# Altium PCB 水下去机器人控制板2020.PcbDoc
Units mm, origin at the board's own origin, x right, y up, seen from the top; angles counter-clockwise.
Board outline 100 x 96 mm, 4 copper layers (Top Layer, AGND, PWR, Bottom Layer), stack 0.603 mm thick; 156 components, 105 nets, 515 pads, 256 vias.
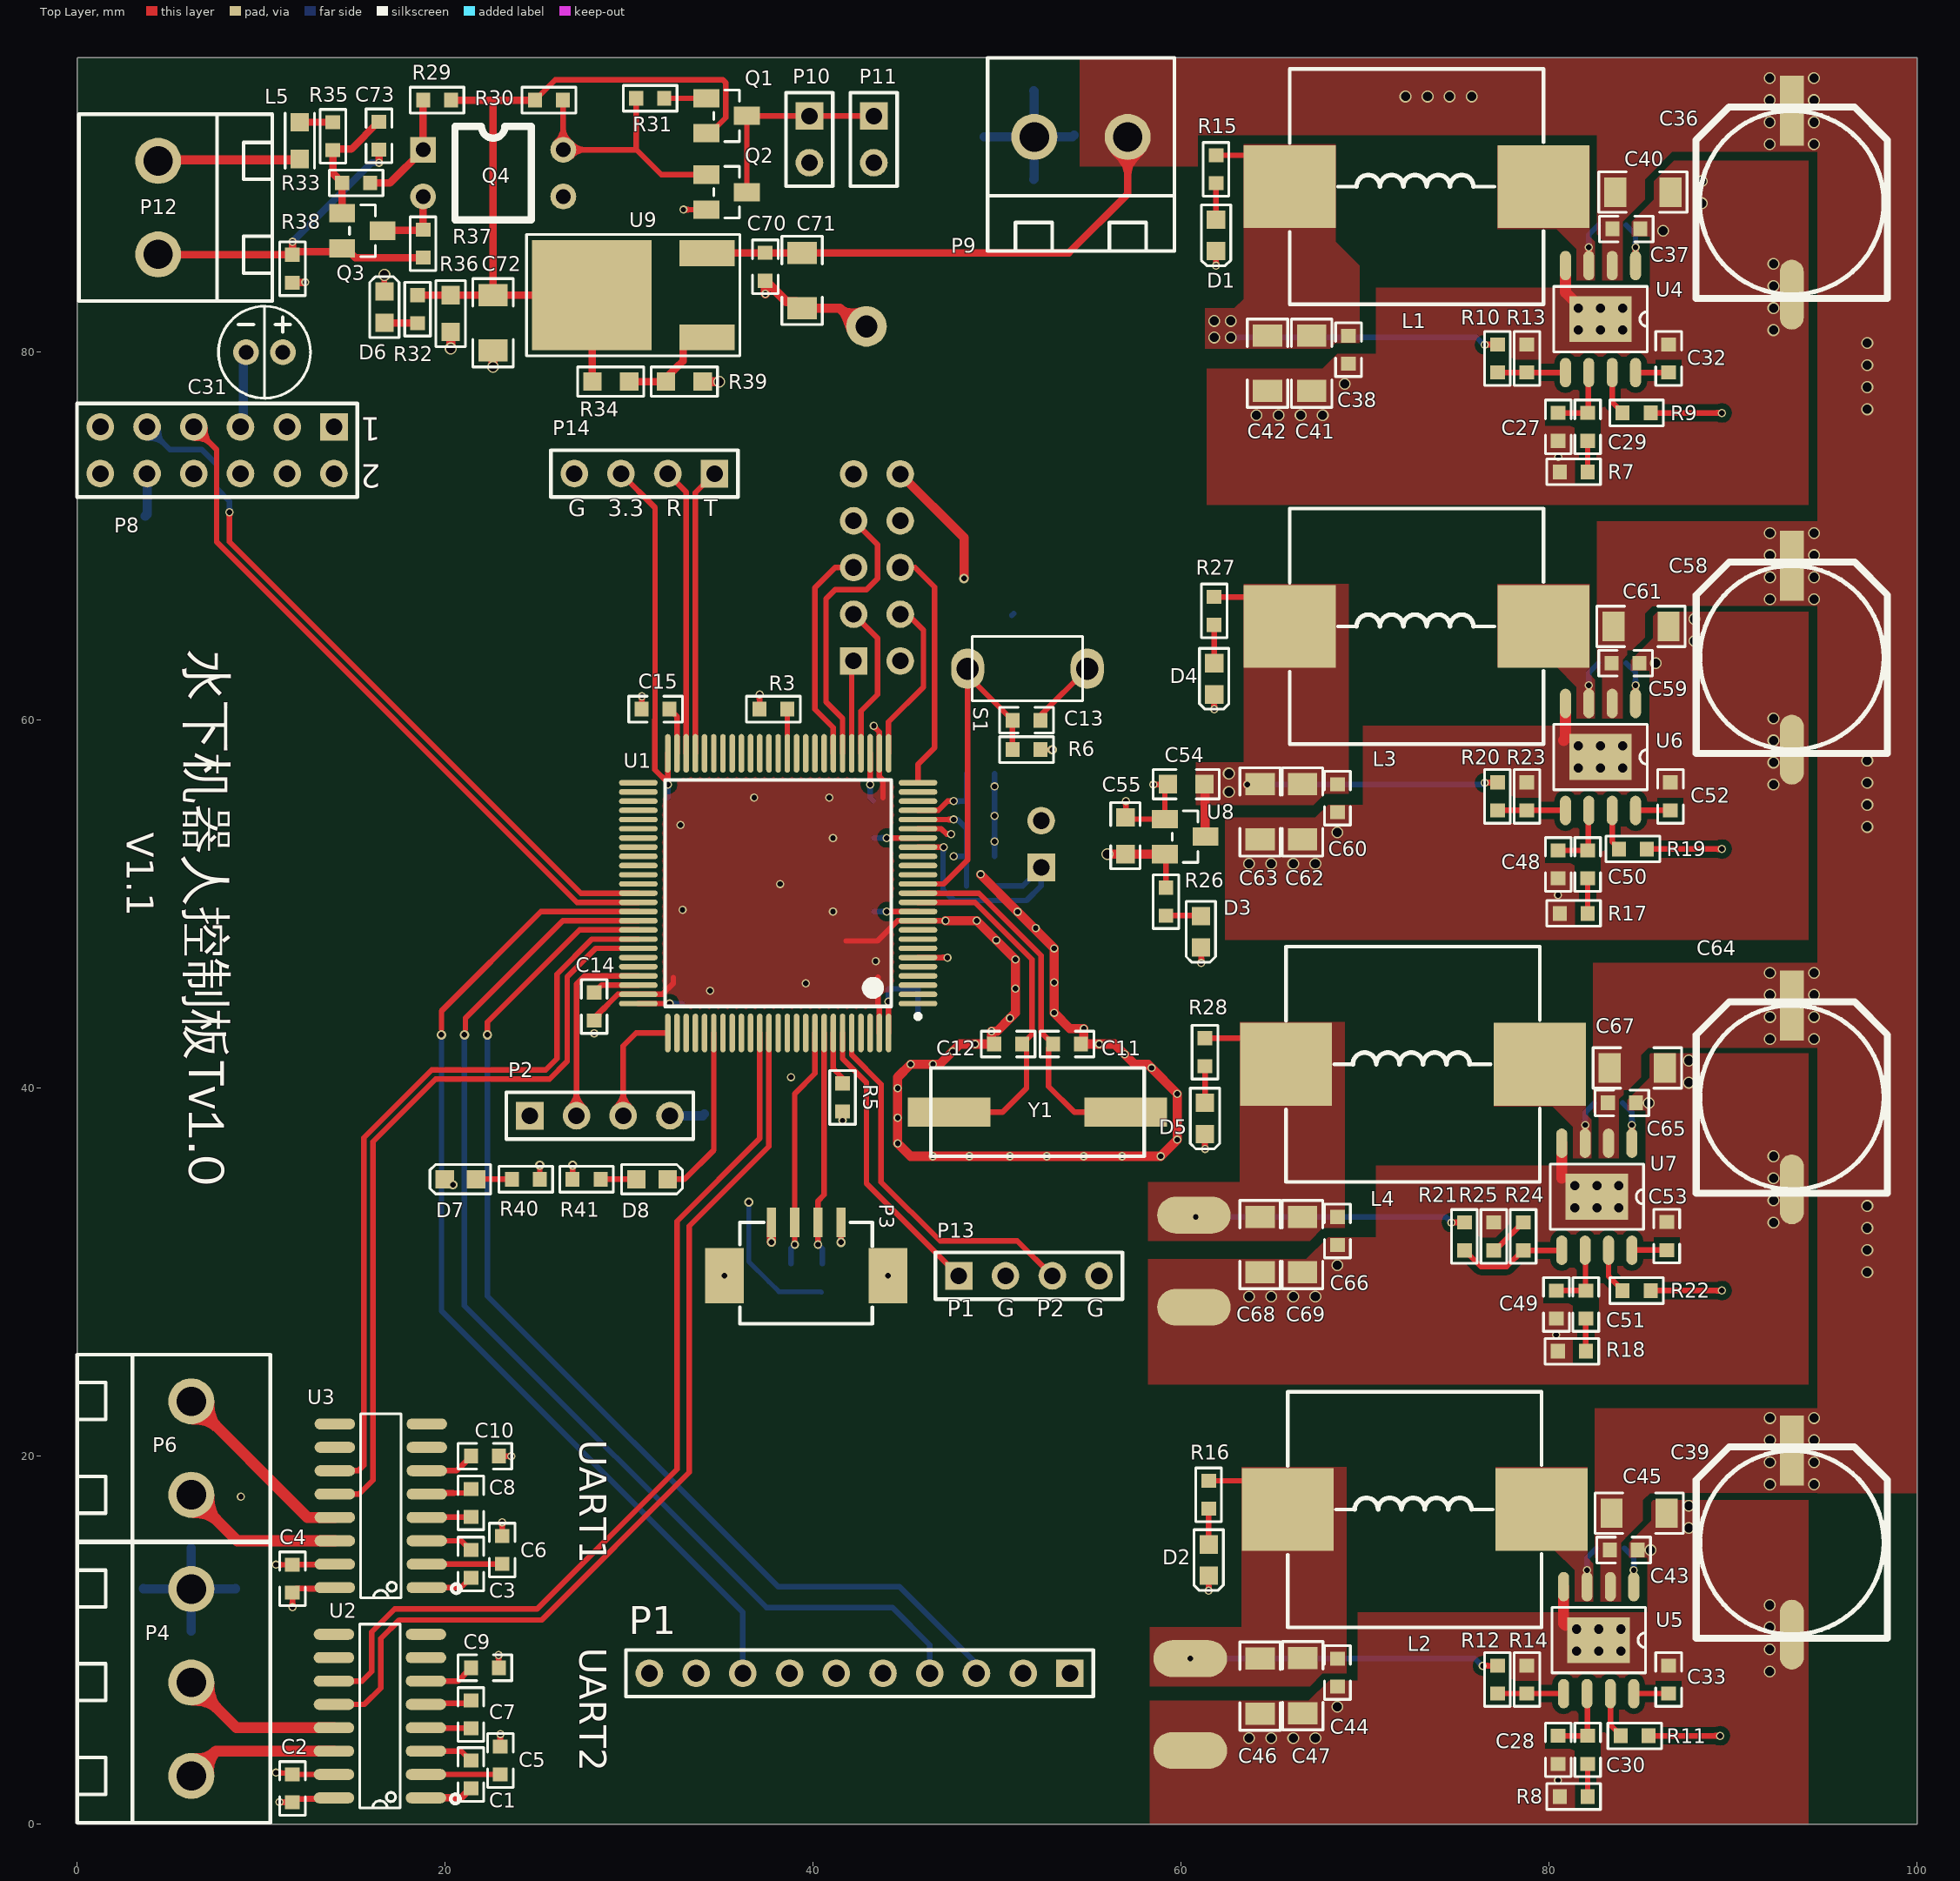
[diagram p0: Top Layer view]
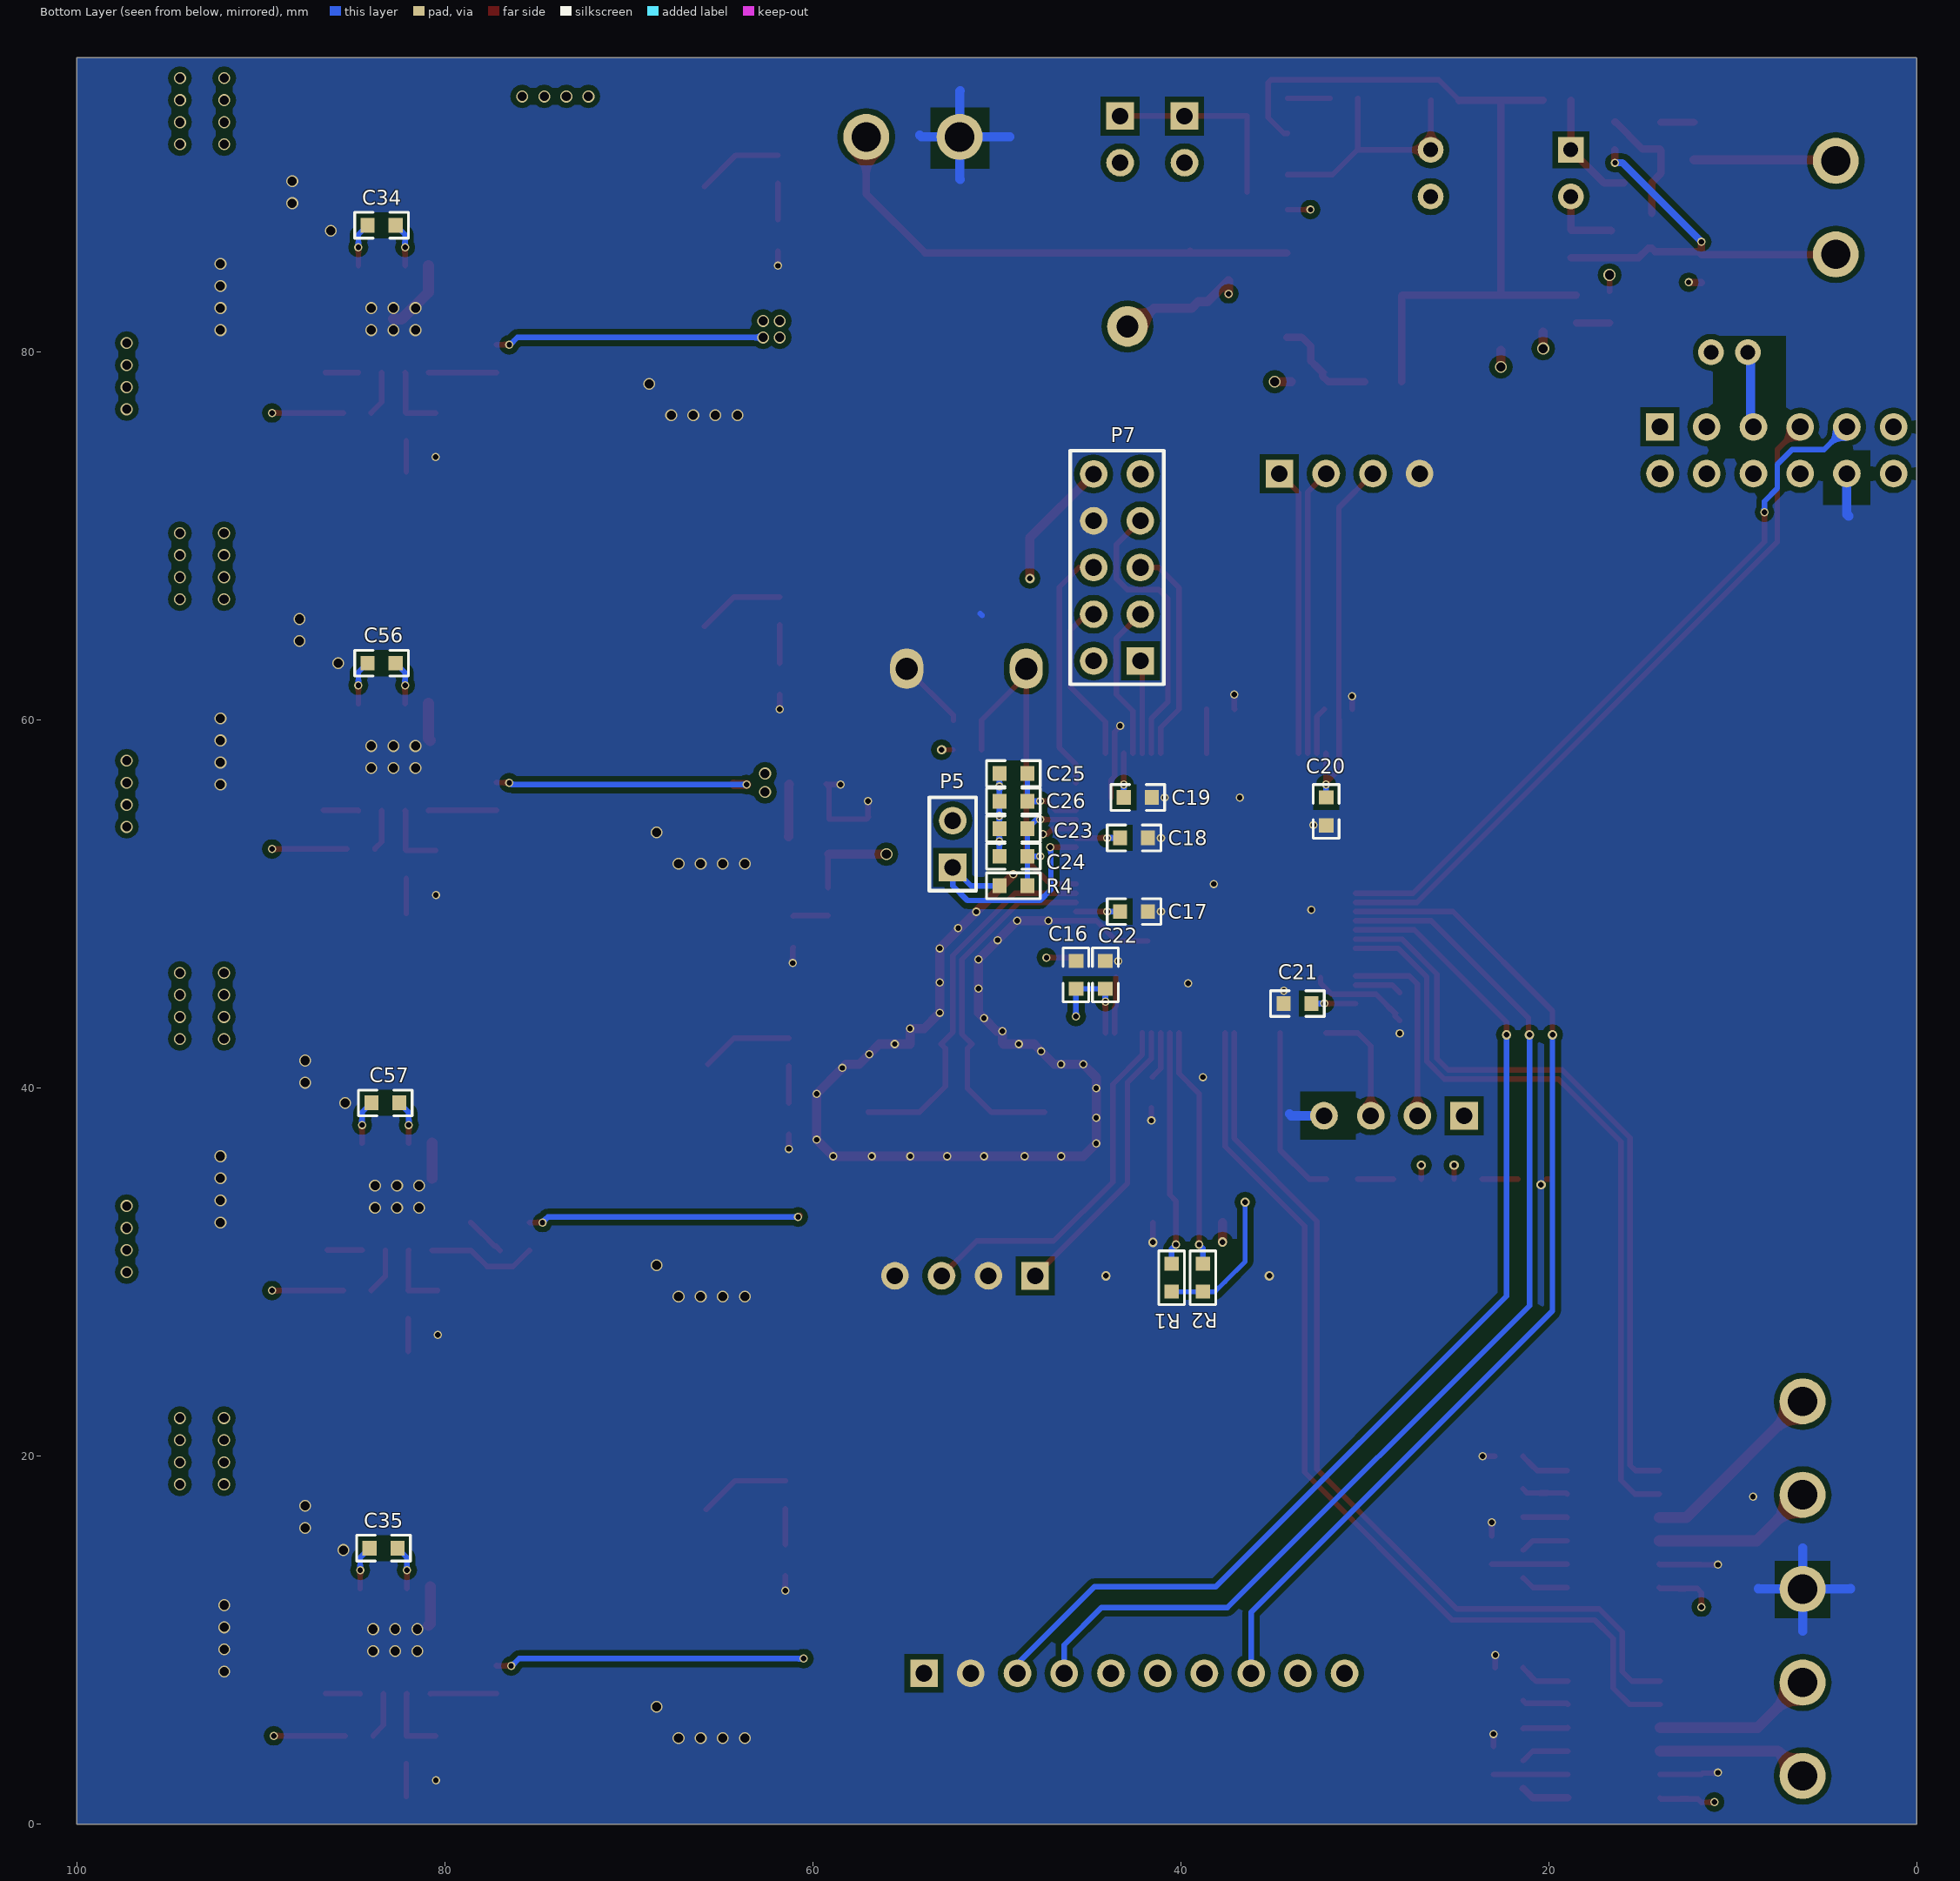
[diagram p1: Bottom Layer view, seen from below]
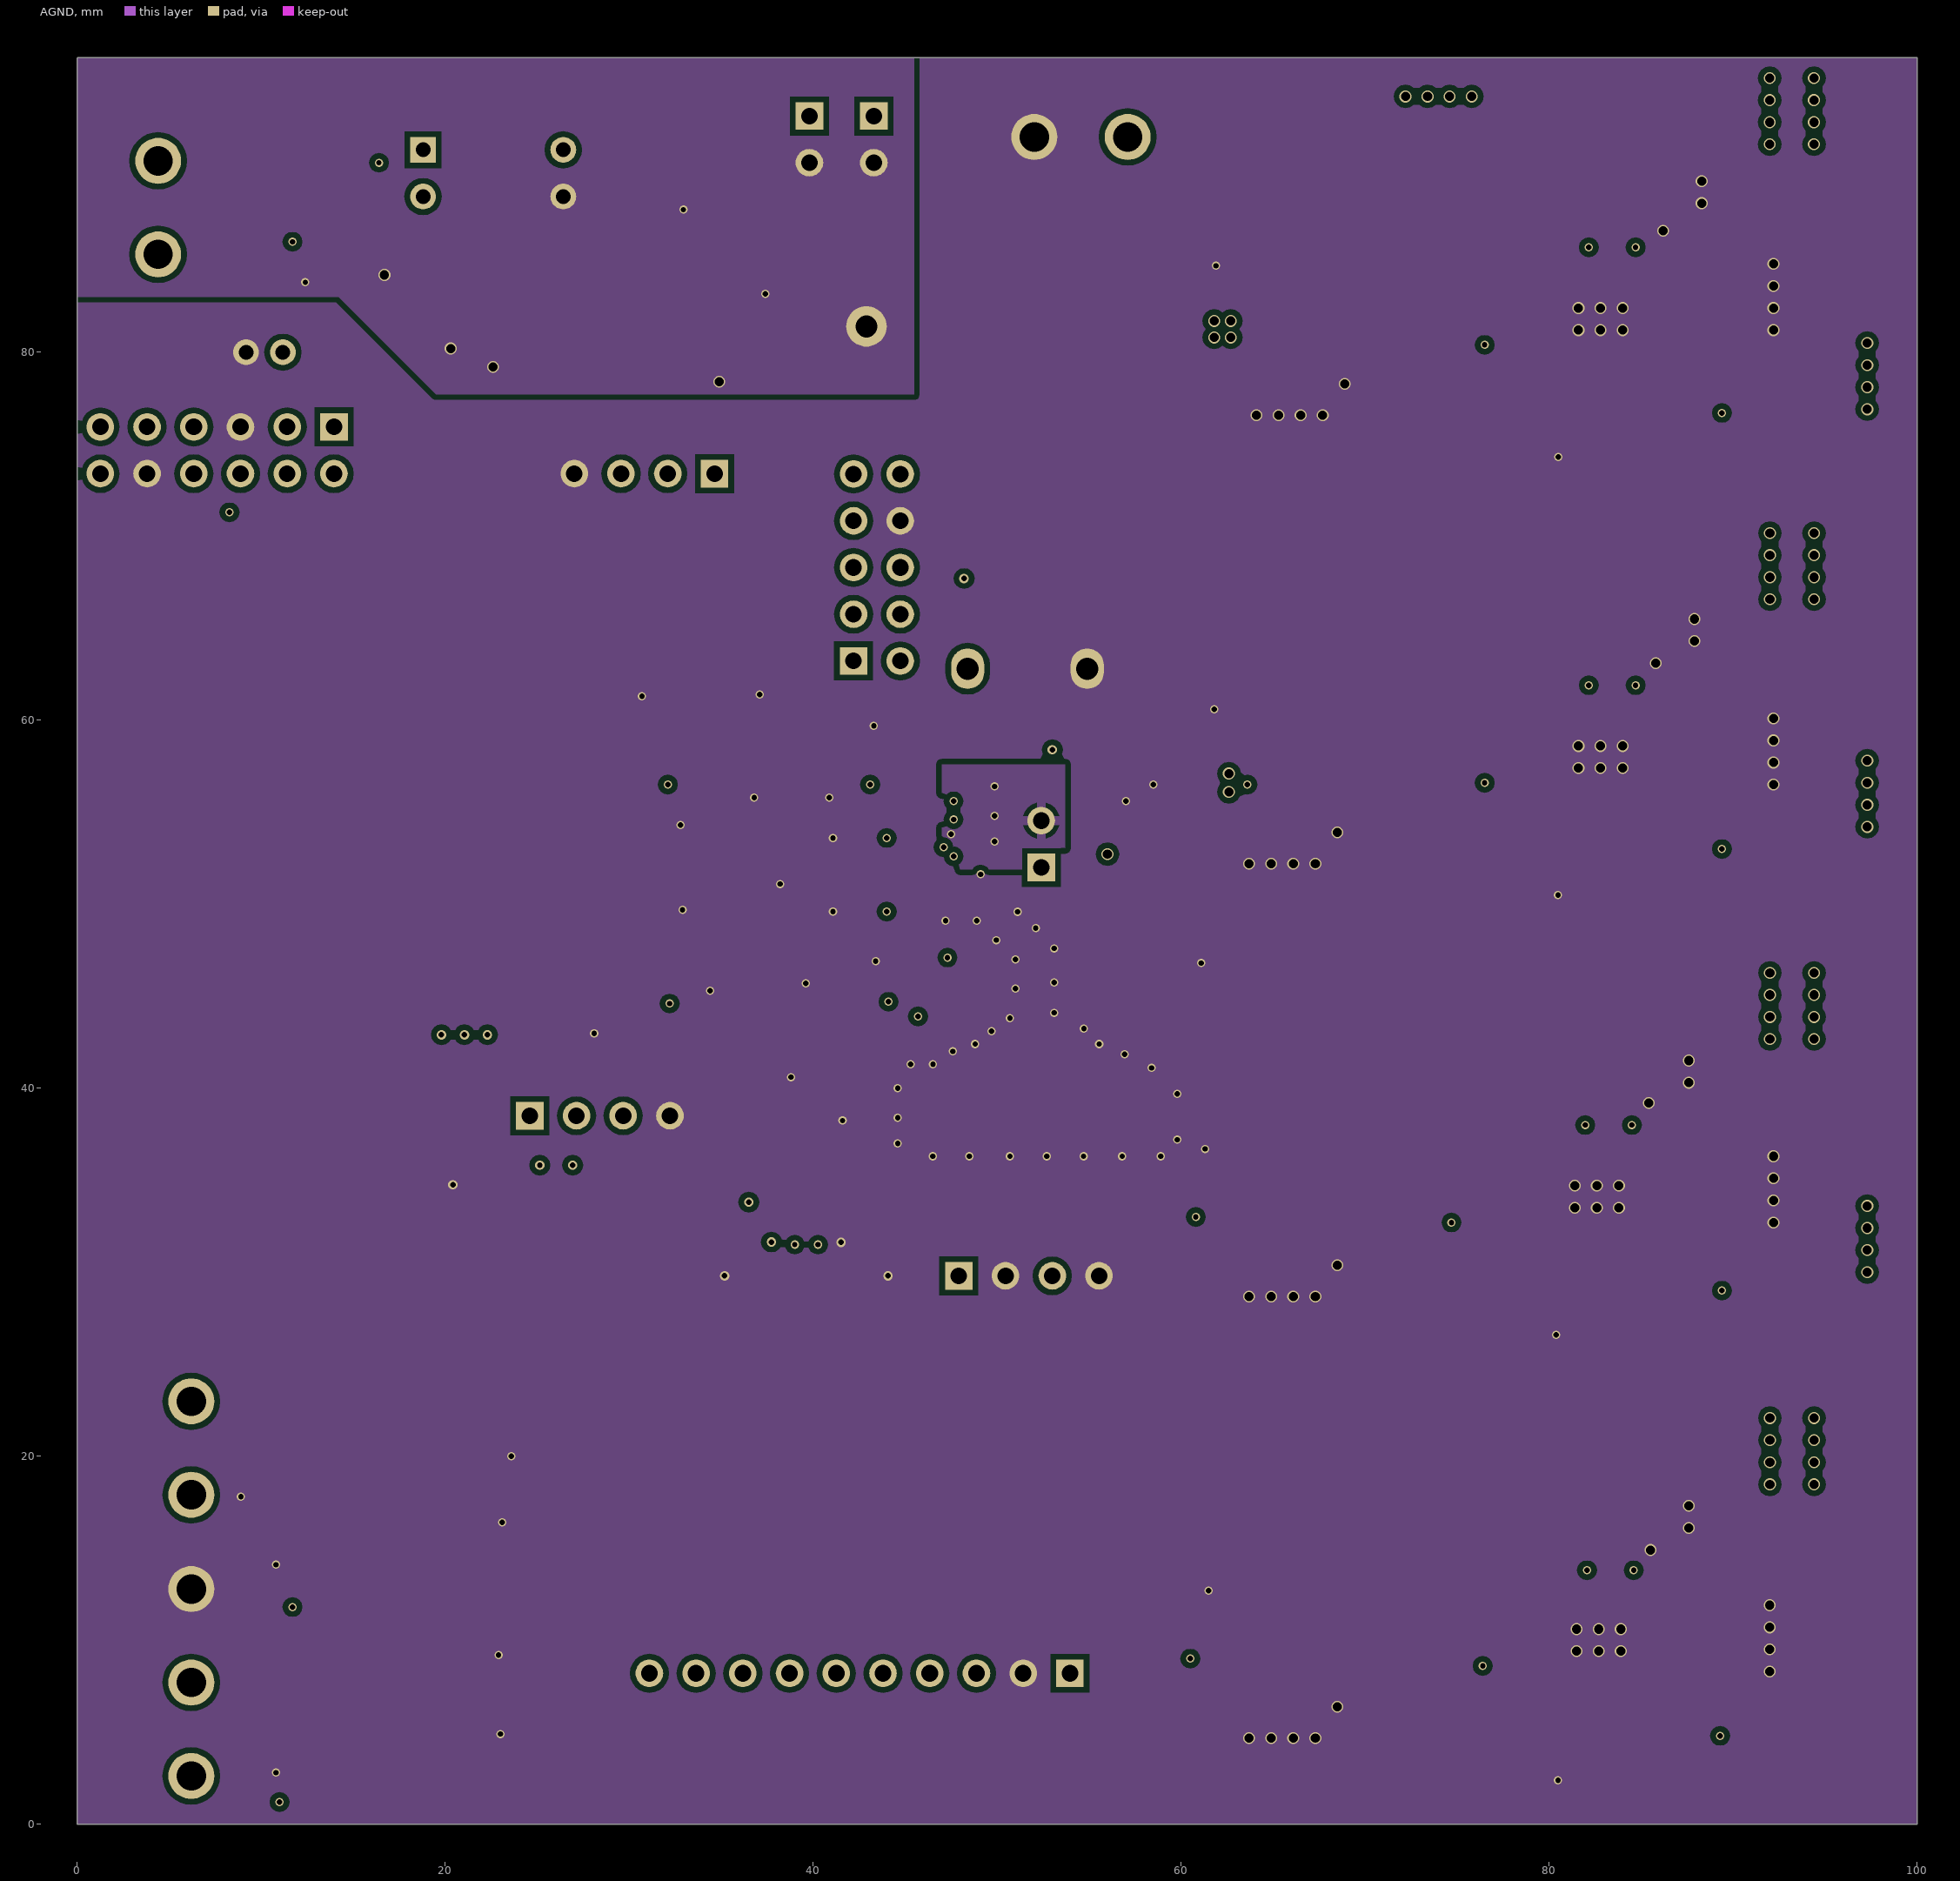
[diagram p2: AGND]
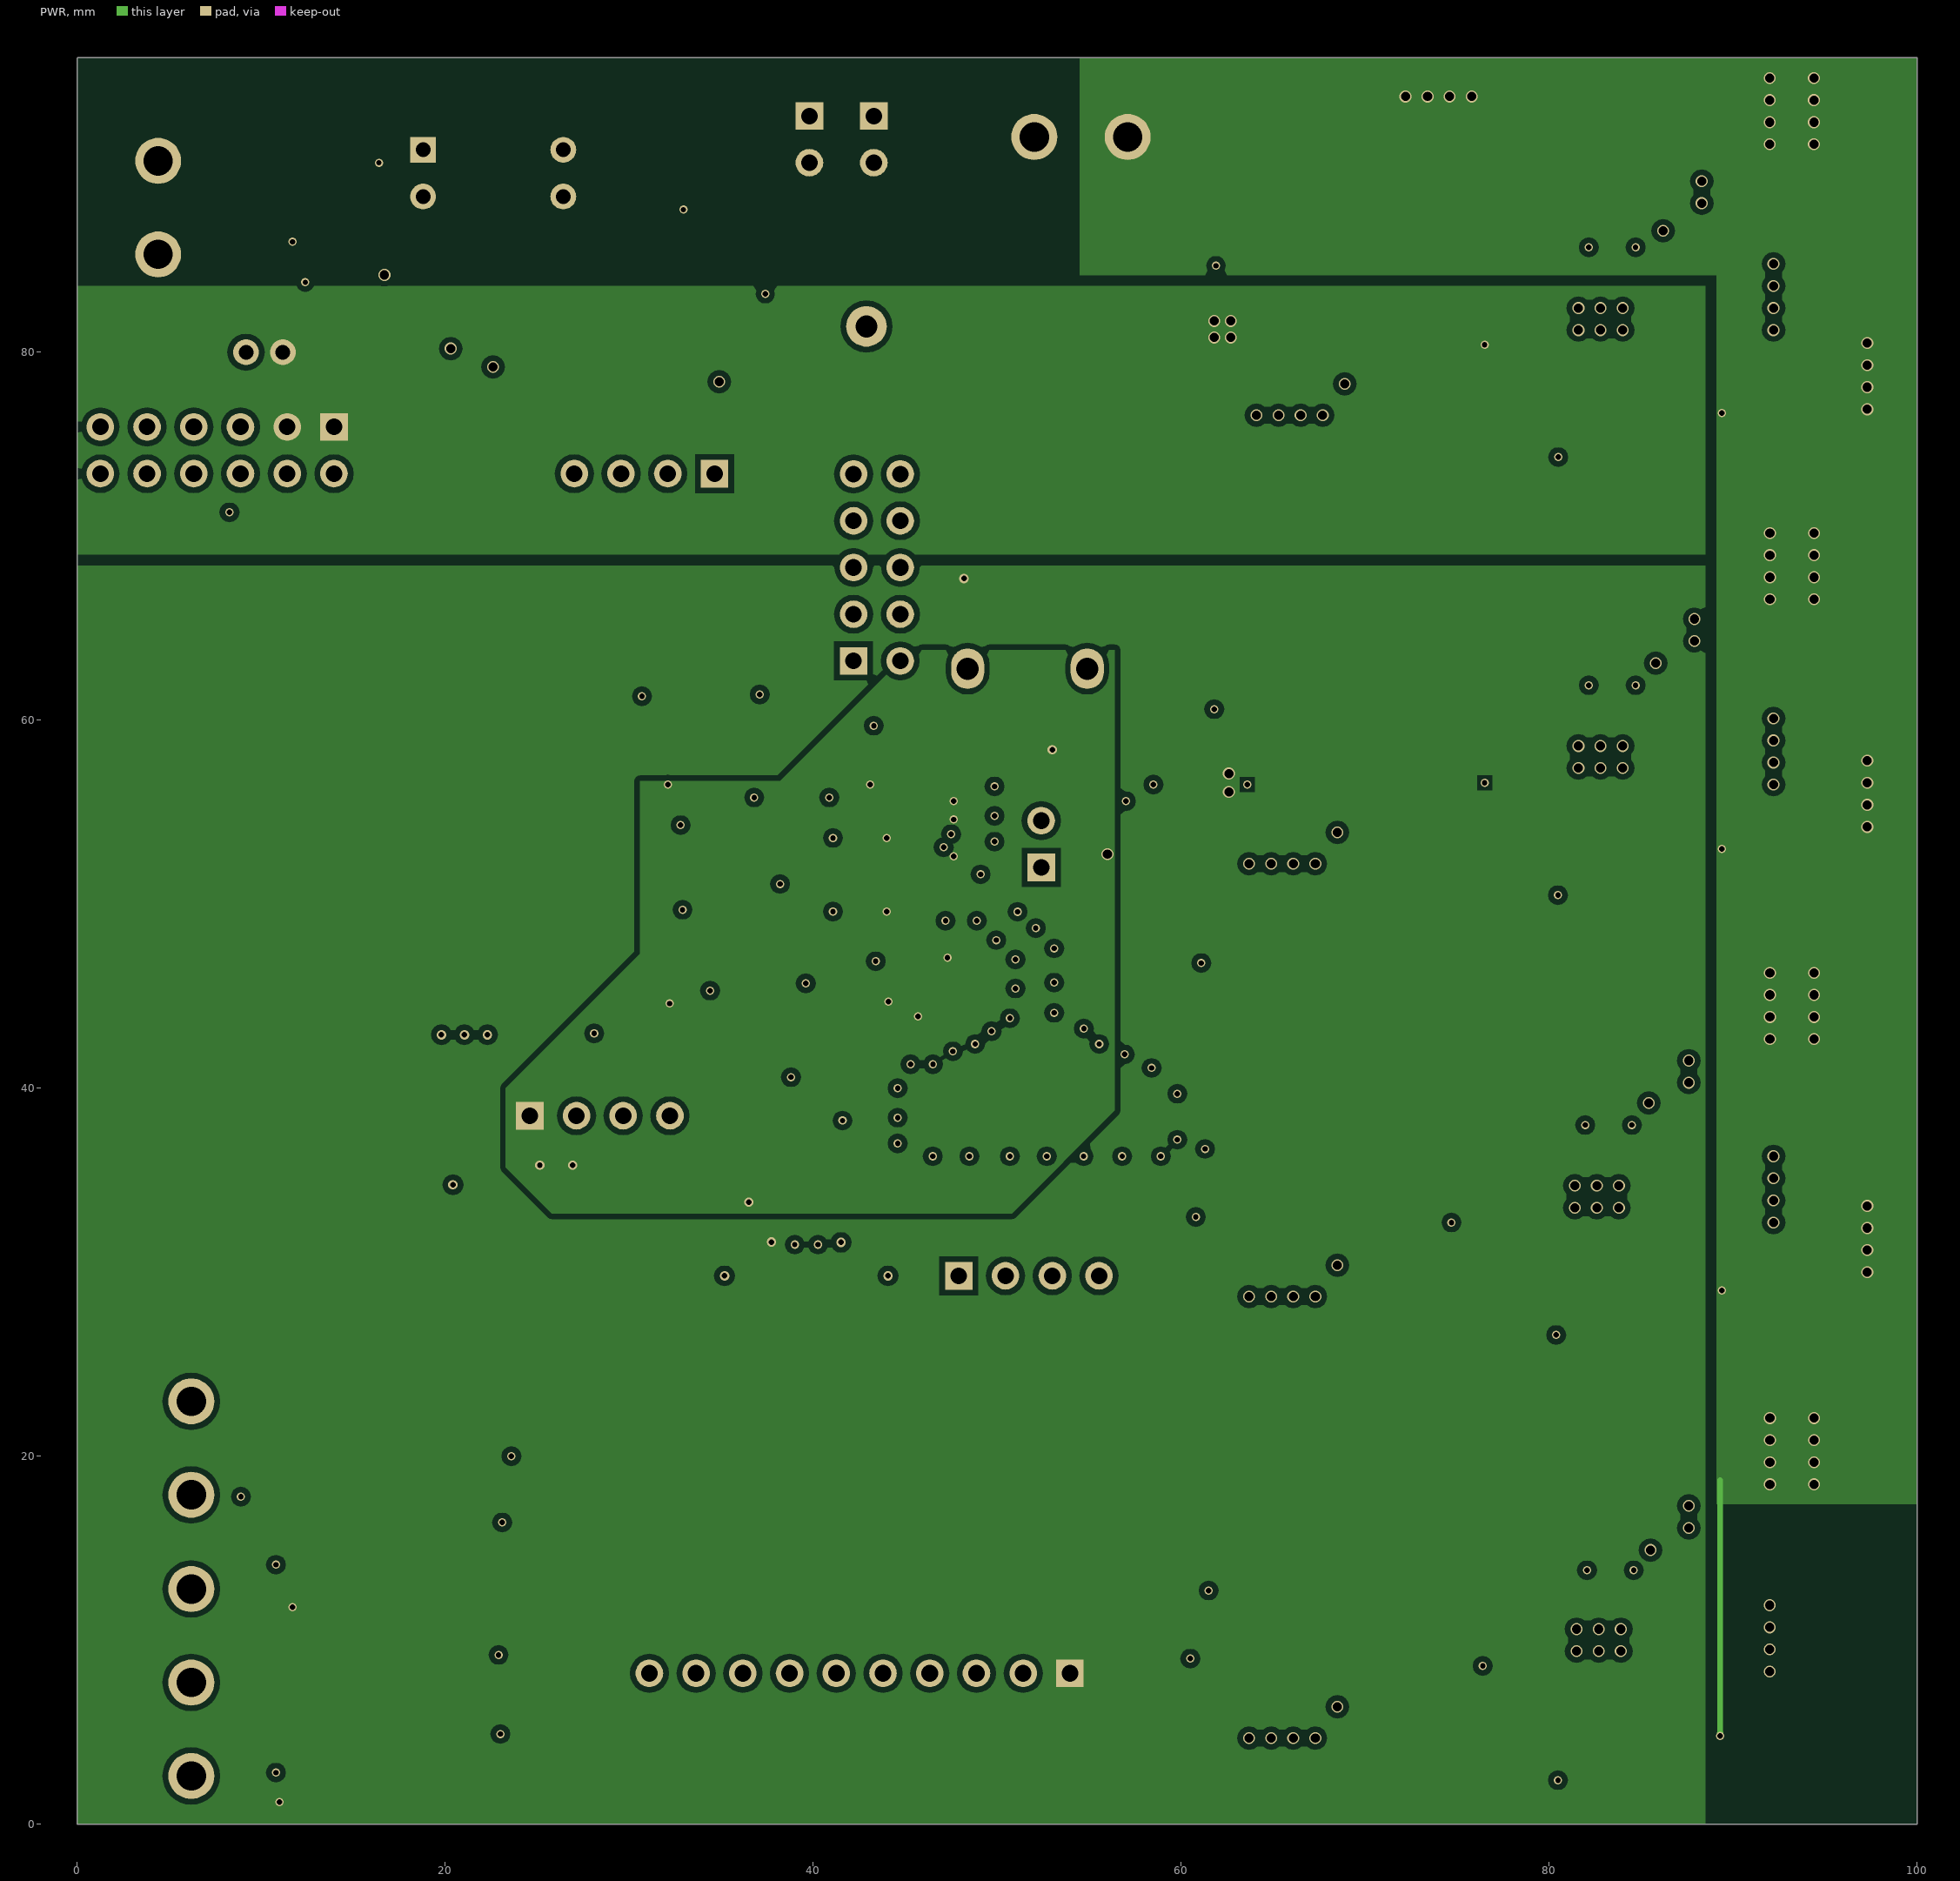
[diagram p3: PWR]

## Layer stack, top to bottom
Top Solder: solder mask 0.0102, Solder Resist, Dk 3.5
Top Layer: signal copper 0.0356
Dielectric 2: prepreg 0.0711, PP-006, Dk 4.1
AGND: signal copper 0.035
Dielectric 1: dielectric 0.32, FR-4, Dk 4.8
PWR: signal copper 0.035
Dielectric 3: prepreg 0.0711, PP-006, Dk 4.1
Bottom Layer: signal copper 0.0356
Bottom Solder: solder mask 0.0102, Solder Resist, Dk 3.5

## Board outline
0,0 100,0 100,96 0.023,96 0,95.977

## Design rules (kind name [scope] priority, off if disabled: settings)
Clearance POLYGON [InPolygon] p1: gap=0.3 ignorepadtopadclearanceinfootprint=TRUE
Clearance [All] p2: gap=0.2 ignorepadtopadclearanceinfootprint=TRUE
ComponentClearance [All] p1: gap=0 collisioncheckmode=3 verticalgap=0 showdistances=FALSE
DiffPairsRouting DiffPair_90OMDiffPairsRouting [InDifferentialPair('DifferentialPair_USB')] p1: maxlimit=0.152 minlimit=0.152 mostfreqgap=0.152 toplayer_minwidth=0.254 toplayer_maxwidth=0.254 toplayer_prefwidth=0.254 midlayer1_minwidth=0.254 midlayer1_maxwidth=0.254 midlayer1_prefwidth=0.254 midlayer2_minwidth=0.254 midlayer2_maxwidth=0.254 midlayer2_prefwidth=0.254 bottomlayer_minwidth=0.254 bottomlayer_maxwidth=0.254 bottomlayer_prefwidth=0.254 maxuncoupledlength=12.7
MatchedLengths DiffPair_MatchedLengths [InDifferentialPair ('DifferentialPair_USB')] p1: tolerance=25.4 checknetsindiffpair=TRUE checkdiffpairvsdiffpair=FALSE checkxsignals=FALSE checkothers=FALSE
MatchedLengths DiffPair_MatchedLengths_1 [All] p2: tolerance=25.4 checknetsindiffpair=FALSE checkdiffpairvsdiffpair=TRUE checkxsignals=TRUE checkothers=TRUE
MatchedLengths DiffPair_90OMMatchedLengths [All] p3: tolerance=25.4 checknetsindiffpair=TRUE checkdiffpairvsdiffpair=FALSE checkxsignals=FALSE checkothers=FALSE
PolygonConnect [InNet('AGND')] p1: thpad.connectstyle=Relief thpad.reliefconductorwidth=0.5 thpad.reliefentries=4 thpad.polygonreliefangle="90 Angle" thpad.airgapwidth=0.254 smdpad.connectstyle=Relief smdpad.reliefconductorwidth=0.5 smdpad.reliefentries=4 smdpad.polygonreliefangle="90 Angle" smdpad.airgapwidth=0.254 via.connectstyle=Direct via.reliefconductorwidth=0.4 via.reliefentries=4 via.polygonreliefangle="90 Angle" via.airgapwidth=0.254
PolygonConnect PolygonGND [All] p2: connectstyle=Direct reliefconductorwidth=0.254 reliefentries=4 polygonreliefangle="90 Angle" airgapwidth=0.254
RoutingVias [All] p1: holewidth=0.4 width=0.55 viastyle="Through Hole" minholewidth=0.3 minwidth=0.45 maxholewidth=0.7 maxwidth=0.75
SilkToSilkClearance [All] p1: silktosilkclearance=0
SilkToSolderMaskClearance [IsPad] p1: minsilkscreentomaskgap=0 clearancetoexposedcopper=TRUE
SolderMaskExpansion [All] p1: expansion=0.102 istentingtop=FALSE
Width [All] p1: maxlimit=2.54 minlimit=0.254 preferedwidth=0.254
26 further rules are at their usual default settings.

## Classes and differential pairs
component class 电源: C27 C28 C29 C30 C31 C32 C33 C34 C35 C36 C37 C38 C39 C40 C41 C42 C43 C44 C45 C46 C47 C48 C49 C50 C51 C52 C53 C54 C55 C56 C57 C58 C59 C60 C61 C62 C63 C64 C65 C66 C67 C68 C69 C70 C71 C72 C73 D1 D2 D3 D4 D5 D6 L1 L2 L3 L4 L5 P8 P9 P10 P11 P12 Q1 Q2 Q3 Q4 R7 R8 R9 R10 R11 R12 R13 R14 R15 R16 R17 R18 R19 R20 R21 R22 R23 R24 R25 R26 R27 R28 R29 R30 R31 R32 R33 R34 R35 R36 R37 R38 R39 U4 U5 U6 U7 U8 U9
component class 主控: C1 C2 C3 C4 C5 C6 C7 C8 C9 C10 C11 C12 C13 C14 C15 C16 C17 C18 C19 C20 C21 C22 C23 C24 C25 C26 D7 D8 P1 P2 P3 P4 P5 P6 P7 P13 P14 R1 R2 R3 R4 R5 R6 R40 R41 S1 U1 U2 U3 Y1

## Components (designator, comment, footprint, x,y, rotation, side; value= is the part's Value field where it differs from the comment)
C1 "0603C" 0603C 21.4,2.7 r270 top
C2 "0603C" 0603C 11.7,1.94 r90 top
C3 "0603C" 0603C 21.4,14.14 r270 top
C4 "0603C" 0603C 11.7,13.34 r90 top
C5 "0603C" 0603C 23,3.46 r270 top
C6 "0603C" 0603C 23.1,14.9 r270 top
C7 "0603C" 0603C 21.4,5.96 r270 top
C8 "0603C" 0603C 21.4,17.46 r270 top
C9 "0603C" 0603C 22.16,8.5 r180 top
C10 "0603C" 0603C 22.16,20 r180 top
C11 "0603C" 0603C 53.8,42.4 r0 top
C12 "0603C" 0603C 50.6,42.4 r180 top
C13 "0603C" 0603C 51.6,60 r180 top
C14 "0603C" 0603C 28.1,44.44 r90 top
C15 "0603C" 0603C 31.44,60.6 r0 top
C16 "0603C" 0603C 45.7,46.16 r270 bottom
C17 "0603C" 0603C 42.54,49.6 r0 bottom
C18 "0603C" 0603C 42.54,53.6 r0 bottom
C19 "0603C" 0603C 42.34,55.8 r0 bottom
C20 "0603C" 0603C 32.1,55.04 r90 bottom
C21 "0603C" 0603C 33.66,44.6 r180 bottom
C22 "0603C" 0603C 44.1,46.16 r270 bottom
C23 "0603C" 0603C 49.1,54.1 r180 bottom
C24 "0603C" 0603C 49.1,52.6 r180 bottom
C25 "0603C" 0603C 49.1,57.1 r0 bottom
C26 "0603C" 0603C 49.1,55.6 r0 bottom
C27 "0603C" 0603C 80.5,75.94 r90 top
C28 "0603C" 0603C 80.5,4.04 r90 top
C29 "0603C" 0603C 82.1,75.94 r90 top
C30 "0603C" 0603C 82.1,4.04 r90 top
C31 "1206C" 固态电容5*9 10.177,80 r0 top
C32 "0603C" 0603C 86.5,79.66 r90 top
C33 "0603C" 0603C 86.5,7.86 r90 top
C34 "0603C" 0603C 83.44,86.9 r0 bottom
C35 "0603C" 0603C 83.34,15 r0 bottom
C36 "10*10贴片电解电容" CAP-10*10.2 93.7,89.4 r90 top
C37 "0603C" 0603C 84.2,86.7 r180 top
C38 "0603C" 0603C 69.1,80.14 r90 top
C39 "10*10贴片电解电容" CAP-10*10.2 93.708,16.57 r90 top
C40 "1206C" 1206C 85.1,88.7 r0 top
C41 "1206C" 1206C 67.1,79.4 r270 top
C42 "1206C" 1206C 64.7,79.4 r270 top
C43 "0603C" 0603C 84.06,14.9 r180 top
C44 "0603C" 0603C 68.5,8.24 r90 top
C45 "1206C" 1206C 84.9,16.9 r0 top
C46 "1206C" 1206C 64.3,7.5 r270 top
C47 "1206C" 1206C 66.614,7.529 r270 top
C48 "0603C" 0603C 80.5,52.16 r90 top
C49 "0603C" 0603C 80.4,28.24 r90 top
C50 "0603C" 0603C 82.1,52.16 r90 top
C51 "0603C" 0603C 82,28.24 r90 top
C52 "0603C" 0603C 86.6,55.86 r90 top
C53 "0603C" 0603C 86.4,31.96 r90 top
C54 "0805C" 0805C 60.277,56.523 r0 top
C55 "0805C" 0805C 56.977,53.723 r270 top
C56 "0603C" 0603C 83.44,63.1 r0 bottom
C57 "0603C" 0603C 83.24,39.2 r0 bottom
C58 "10*10贴片电解电容" CAP-10*10.2 93.708,64.67 r90 top
C59 "0603C" 0603C 84.16,63.1 r180 top
C60 "0603C" 0603C 68.5,55.76 r90 top
C61 "1206C" 1206C 85,65.1 r0 top
C62 "1206C" 1206C 66.6,55.02 r270 top
C63 "1206C" 1206C 64.3,55.02 r270 top
C64 "10*10贴片电解电容" CAP-10*10.2 93.708,40.77 r90 top
C65 "0603C" 0603C 83.96,39.2 r180 top
C66 "0603C" 0603C 68.5,32.24 r90 top
C67 "1206C" 1206C 84.8,41.1 r0 top
C68 "1206C" 1206C 64.3,31.5 r270 top
C69 "1206C" 1206C 66.6,31.5 r270 top
C70 "0603C" 0603C 37.4,84.64 r90 top
C71 "1206C" 1206C 39.4,83.9 r270 top
C72 "1206C" 1206C 22.6,81.6 r270 top
C73 "0603C" 0603C 16.4,91.76 r90 top
D1 "0603D" 0603D 61.9,86.35 r270 top
D2 "0603D" 0603D 61.5,14.35 r270 top
D3 "0603D" 0603D 61.077,48.5 r270 top
D4 "0603D" 0603D 61.8,62.25 r270 top
D5 "0603D" 0603D 61.3,38.35 r270 top
D6 "0603D" 0603D 16.7,82.45 r90 top
D7 "0603D" 0603D 20.828,35.052 r180 top
D8 "0603D" 0603D 31.242,35.052 r0 top
L1 "1265L" 1265L 79.7,89 r180 top
L2 "1265L" 1265L 79.6,17.1 r180 top
L3 "1265L" 1265L 79.7,65.1 r180 top
L4 "1265L" 1265L 79.5,41.3 r180 top
L5 "0805L" 0805L 12.1,91.5 r90 top
P1 "Header 10" HDR1X10 53.96,8.2 r180 top
P2 "Header 4" HDR1X4 24.597,38.5 r0 top
P3 "1.27mm-4p" 1.27mm-4P 41.52,32.7 r180 top
P4 "Header 3" DB129-3 6.2,2.62 r90 top
P5 "Header 2" HDR1X2 52.4,52 r90 bottom
P6 "Header 2" DB129 6.2,17.9 r90 top
P7 "Header 5X2" HDR2X5 42.2,63.22 r90 bottom
P8 "Header 6X2" HDR2X6 13.957,75.94 r180 top
P9 "Header 2" DB129 57.1,91.7 r180 top
P10 "Header 2" HDR1X2 39.8,92.84 r270 top
P11 "Header 2" HDR1X2 43.3,92.84 r270 top
P12 "Header 2" DB129 4.4,90.4 r270 top
P13 "Header 4" HDR1X4 47.92,29.8 r0 top
P14 "Header 4" HDR1X4 34.64,73.4 r180 top
Q1 "SS8550" SOT23-3 35.3,92.85 r270 top
Q2 "SS8050" SOT23-3 35.3,88.7 r270 top
Q3 "SS8050" SOT23-3 15.5,86.6 r270 top
Q4 "光耦" DIP4 18.8,91 r0 top
R1 "0603R" 0603R 40.5,29.7 r270 bottom
R2 "0603R" 0603R 38.8,29.7 r270 bottom
R3 "0603R" 0603R 37.84,60.6 r0 top
R4 "0603R" 0603R 49.1,51 r180 bottom
R5 "0603R" 0603R 41.6,39.5 r270 top
R6 "0603R" 0603R 51.6,58.4 r0 top
R7 "0603R" 0603R 81.34,73.5 r180 top
R8 "0603R" 0603R 81.34,1.5 r180 top
R9 "0603R" 0603R 84.76,76.7 r0 top
R10 "0603R" 0603R 77.2,79.66 r90 top
R11 "0603R" 0603R 84.66,4.8 r0 top
R12 "0603R" 0603R 77.2,7.86 r90 top
R13 "0603R" 0603R 78.8,79.66 r270 top
R14 "0603R" 0603R 78.8,7.86 r270 top
R15 "0603R" 0603R 61.9,89.94 r270 top
R16 "0603R" 0603R 61.5,17.9 r270 top
R17 "0603R" 0603R 81.34,49.5 r180 top
R18 "0603R" 0603R 81.24,25.7 r180 top
R19 "0603R" 0603R 84.56,53 r0 top
R20 "0603R" 0603R 77.2,55.86 r90 top
R21 "0603R" 0603R 75.4,31.94 r90 top
R22 "0603R" 0603R 84.76,29 r0 top
R23 "0603R" 0603R 78.8,55.86 r270 top
R24 "0603R" 0603R 78.6,31.94 r270 top
R25 "0603R" 0603R 77,31.94 r270 top
R26 "0603R" 0603R 59.177,50.14 r270 top
R27 "0603R" 0603R 61.8,65.94 r270 top
R28 "0603R" 0603R 61.3,41.96 r270 top
R29 "0603R" 0603R 19.56,93.7 r180 top
R30 "0603R" 0603R 25.64,93.7 r0 top
R31 "0603R" 0603R 31.14,93.8 r0 top
R32 "0603R" 0603R 18.5,82.34 r270 top
R33 "0603R" 0603R 15.16,89.2 r0 top
R34 "0805R" 0805R 29,78.4 r180 top
R35 "0603R" 0603R 13.9,91.74 r90 top
R36 "0805R" 0805R 20.3,82.1 r90 top
R37 "0603R" 0603R 18.8,85.9 r90 top
R38 "0603R" 0603R 11.7,84.54 r270 top
R39 "0805R" 0805R 33,78.4 r180 top
R40 "0603R" 0603R 24.384,35.052 r180 top
R41 "0603R" 0603R 27.686,35.052 r0 top
S1 "SW-PB" "按键 3x6" 48.4,62.8 r0 top
U1 "STM32F407VxT6" LQFP-100_M 38.1,50.6 r180 top
U2 "MAX232" SOP16 16.456,5.875 r90 top
U3 "MAX232" SOP16 16.5,17.305 r90 top
U4 "TD1519" SOP8-PAD 82.8,81.8 r180 top
U5 "TD1519" SOP8-PAD 82.7,10 r180 top
U6 "TD1519" SOP8-PAD 82.8,58 r180 top
U7 "TD1519" SOP8-PAD 82.6,34.1 r180 top
U8 "662k" SOT23-3 60.221,53.671 r270 top
U9 "LM317" TO252-3 31.1,83.1 r90 top
Y1 "XTAL_5032" XTAL贴片 47.4,38.7 r0 top

## Footprints (in the part's own frame and the unit in brackets; to place one, negate y for a bottom-side part, rotate by r counter-clockwise, add the part's x,y. Pads: shape width x height; smd on the part's side, far side on the other; paste and mask are expansions set on the pad)
1.27mm-4P [mm]
  rect 2.1x3 smd: 1(-2.55,2.9) 1(6.33,2.9)
  rect 0.5x1.6 smd: 1(0,0) 2(1.26,0) 3(2.52,0) 4(3.78,0)
  silkscreen extent -1.7,0 5.5,5.5
0603C [mm]
  rect 0.76x0.8 smd: 1(-0.76,0) 2(0.76,0)
  silkscreen extent -1.46,-0.7 1.46,0.7
0603D [mm]
  rect 1x1 smd: 1(-0.85,0) 2(0.85,0)
  silkscreen extent -1.65,-0.8 1.65,0.8
0603R [mm]
  rect 0.76x0.8 smd: 1(-0.76,0) 2(0.76,0)
  silkscreen extent -1.46,-0.7 1.46,0.7
0805C [mm]
  rect 1x1 smd: 1(-1,0) 2(1,0)
  silkscreen extent -1.8,-0.8 1.8,0.8
0805L [mm]
  rect 1x1 smd: 1(-1,0) 2(1,0)
  silkscreen extent -1.5,-0.8 1.5,0.8
0805R [mm]
  rect 1x1 smd: 1(-1,0) 2(1,0)
  silkscreen extent -1.8,-0.8 1.8,0.8
1206C [mm]
  rect 1.2x1.6 smd: 1(-1.5,0) 2(1.5,0)
  silkscreen extent -2.4,-1.1 2.4,1.1
1265L [mm]
  rect 5x4.5 smd: 1(0,0) 2(13.8,0)
  silkscreen extent 0,-6.4 13.8,6.4
CAP-10*10.2 [mm] "贴片电解电容，10*10.5"
  rect 3.8x1.3 smd: 1(3.73,0.508)
  oval 3.8x1.3 smd: 2(-6.27,0.508)
  silkscreen extent -6.47,-4.69 3.93,5.71, body extent -7.07,-4.64 4.53,5.66, height 10.2
DB129 [mm]
  round 2.5 hole 1.6 mask+0.1: 1(0,0) 2(5.08,0)
  silkscreen extent -2.54,-4.3 7.62,6.2
DB129-3 [mm]
  round 2.5 hole 1.6 mask+0.1: 1(0,0) 2(5.08,0) 3(10.16,0)
  silkscreen extent -2.54,-4.3 12.7,6.2
DIP4 [mm]
  rect 1.4x1.4 hole 0.8: 1(0,0)
  round 1.4 hole 0.8: 2(0,-2.54) 3(7.62,-2.54) 4(7.62,0)
  silkscreen extent 1.73,-3.81 5.89,1.27
HDR1X2 [mm] "Connector; Header; 2 Position"
  rect 1.5x1.5 hole 0.9: 1(0,0)
  round 1.5 hole 0.9: 2(2.54,0)
  silkscreen extent -1.27,-1.27 3.81,1.27
HDR1X4 [mm] "Connector; Header; 4 Position"
  rect 1.5x1.5 hole 0.9: 1(0,0)
  round 1.5 hole 0.9: 2(2.54,0) 3(5.08,0) 4(7.62,0)
  silkscreen extent -1.27,-1.27 8.89,1.27
HDR1X10 [mm] "Connector; Header; 10 Position"
  rect 1.5x1.5 hole 0.9: 1(0,0)
  round 1.5 hole 0.9: 2(2.54,0) 3(5.08,0) 4(7.62,0) 5(10.16,0) 6(12.7,0) 7(15.24,0) 8(17.78,0) 9(20.32,0) 10(22.86,0)
  silkscreen extent -1.27,-1.27 24.13,1.27
HDR2X5 [mm] "Connector; Header; 5x2 Position"
  rect 1.5x1.5 hole 0.9: 1(0,0)
  round 1.5 hole 0.9: 2(0,2.54) 3(2.54,0) 4(2.54,2.54) 5(5.08,0) 6(5.08,2.54) 7(7.62,0) 8(7.62,2.54) 9(10.16,0) 10(10.16,2.54)
  silkscreen extent -1.27,-1.27 11.43,3.81
HDR2X6 [mm] "Connector; Header; 6x2 Position"
  rect 1.5x1.5 hole 0.9: 1(0,0)
  round 1.5 hole 0.9: 2(0,2.54) 3(2.54,0) 4(2.54,2.54) 5(5.08,0) 6(5.08,2.54) 7(7.62,0) 8(7.62,2.54) 9(10.16,0) 10(10.16,2.54) 11(12.7,0) 12(12.7,2.54)
  silkscreen extent -1.27,-1.27 13.97,3.81
LQFP-100_M [mm] "Thin QFP, 100"
  oval 2.1x0.3 smd: 1(-7.6,6) 2(-7.6,5.5) 3(-7.6,5) 4(-7.6,4.5) 5(-7.6,4) 6(-7.6,3.5) 7(-7.6,3) 8(-7.6,2.5) 9(-7.6,2) 10(-7.6,1.5) 11(-7.6,1) 12(-7.6,0.5) 13(-7.6,0) 14(-7.6,-0.5) 15(-7.6,-1) 16(-7.6,-1.5) 17(-7.6,-2) 18(-7.6,-2.5) 19(-7.6,-3) 20(-7.6,-3.5) 21(-7.6,-4) 22(-7.6,-4.5) 23(-7.6,-5) 24(-7.6,-5.5) 25(-7.6,-6) 51(7.6,-6) 52(7.6,-5.5) 53(7.6,-5) 54(7.6,-4.5) 55(7.6,-4) 56(7.6,-3.5) 57(7.6,-3) 58(7.6,-2.5) 59(7.6,-2) 60(7.6,-1.5) 61(7.6,-1) 62(7.6,-0.5) 63(7.6,0) 64(7.6,0.5) 65(7.6,1) 66(7.6,1.5) 67(7.6,2) 68(7.6,2.5) 69(7.6,3) 70(7.6,3.5) 71(7.6,4) 72(7.6,4.5) 73(7.6,5) 74(7.6,5.5) 75(7.6,6)
  oval 0.3x2.1 smd: 26(-6,-7.6) 27(-5.5,-7.6) 28(-5,-7.6) 29(-4.5,-7.6) 30(-4,-7.6) 31(-3.5,-7.6) 32(-3,-7.6) 33(-2.5,-7.6) 34(-2,-7.6) 35(-1.5,-7.6) 36(-1,-7.6) 37(-0.5,-7.6) 38(0,-7.6) 39(0.5,-7.6) 40(1,-7.6) 41(1.5,-7.6) 42(2,-7.6) 43(2.5,-7.6) 44(3,-7.6) 45(3.5,-7.6) 46(4,-7.6) 47(4.5,-7.6) 48(5,-7.6) 49(5.5,-7.6) 50(6,-7.6) 76(6,7.6) 77(5.5,7.6) 78(5,7.6) 79(4.5,7.6) 80(4,7.6) 81(3.5,7.6) 82(3,7.6) 83(2.5,7.6) 84(2,7.6) 85(1.5,7.6) 86(1,7.6) 87(0.5,7.6) 88(0,7.6) 89(-0.5,7.6) 90(-1,7.6) 91(-1.5,7.6) 92(-2,7.6) 93(-2.5,7.6) 94(-3,7.6) 95(-3.5,7.6) 96(-4,7.6) 97(-4.5,7.6) 98(-5,7.6) 99(-5.5,7.6) 100(-6,7.6)
  silkscreen extent -7.73,-6.15 6.15,6.82, body extent -7,-7 7,7, height 0.8
SOP8-PAD [mm]
  oval 0.6x1.6 smd: 1(-1.905,-2.908) 2(-0.635,-2.908) 3(0.635,-2.908) 4(1.905,-2.908) 5(1.905,2.908) 6(0.635,2.908) 7(-0.635,2.908) 8(-1.905,2.908)
  rect 3.4x2.5 smd: 9(0,0)
  silkscreen extent -2.54,-1.78 2.54,1.78
SOP16 [mm]
  oval 0.6x2.2 smd: 1(-4.445,-2.5) 2(-3.175,-2.5) 3(-1.905,-2.5) 4(-0.635,-2.5) 5(0.635,-2.5) 6(1.905,-2.5) 7(3.175,-2.5) 8(4.445,-2.5) 9(4.445,2.5) 10(3.175,2.5) 11(1.905,2.5) 12(0.635,2.5) 13(-0.635,2.5) 14(-1.905,2.5) 15(-3.175,2.5) 16(-4.445,2.5)
  silkscreen extent -5,-4.35 5,1.1
SOT23-3 [mm]
  rect 1x1.4 smd: 1(-0.95,-1.1) 2(0.95,-1.1) 3(0,1.1)
  silkscreen extent -1.4,-0.7 1.4,0.7
TO252-3 [mm]
  rect 1.4x3 smd: 1(-2.285,-3.125) 3(2.285,-3.125)
  rect 6x6.5 smd: 2(0,3.125)
  silkscreen extent -3.3,-4.93 3.3,6.67
XTAL贴片 [mm]
  rect 4.5x1.6 smd: 1(0,0) 2(9.59,0)
  silkscreen extent -1,-2.4 10.6,2.4
固态电容5*9 [mm]
  round 1.4 hole 0.8 mask+0.1: 1(-1,0) 2(1,0)
  silkscreen extent -2.5,-2.5 2.5,2.5
"按键 3x6" [mm]
  oval 1.8x2.2 hole 1.2: 1(0,0) 2(6.5,0)
  silkscreen extent 0.25,-1.75 6.25,1.75

## Part data
P1: "Header, 10-Pin", LatestRevisionDate=17-Jul-2002, LatestRevisionNote="Re-released for DXP Platform.", Publisher="Altium Limited"
P2 P13 P14: "Header, 4-Pin", LatestRevisionDate=17-Jul-2002, LatestRevisionNote="Re-released for DXP Platform.", Publisher="Altium Limited"
P4: "Header, 3-Pin", LatestRevisionDate=17-Jul-2002, LatestRevisionNote="Re-released for DXP Platform.", Publisher="Altium Limited"
P5 P6 P9 P10 P11 P12: "Header, 2-Pin", LatestRevisionDate=17-Jul-2002, LatestRevisionNote="Re-released for DXP Platform.", Publisher="Altium Limited"
P7: "Header, 5-Pin, Dual row", LatestRevisionDate=17-Jul-2002, LatestRevisionNote="Re-released for DXP Platform.", Publisher="Altium Limited"
P8: "Header, 6-Pin, Dual row", LatestRevisionDate=17-Jul-2002, LatestRevisionNote="Re-released for DXP Platform.", Publisher="Altium Limited"
Q4: library part LTV-8141S
S1: "Switch", LatestRevisionDate=17-Jul-2002, LatestRevisionNote="Re-released for DXP Platform.", PackageDescription="Switch; 2 Leads", PackageReference=SPST-2, Published=24-Mar-1999, Publisher="Altium Limited"

## Free pads (board coordinates)
  oval 4x2 smd mask+0.1: 2(60.5,9) 2(60.7,33.1) 3(60.5,4) 3(60.7,28.1)
  round 2.2 hole 1.2 mask+0.1: 4(42.9,81.4)

## Via types
v1: diameter 0.65, hole 0.5, Top Layer to Bottom Layer, 131 vias
v2: diameter 0.45, hole 0.3, Top Layer to Bottom Layer, 112 vias
v3: diameter 0.508, hole 0.305, Top Layer to Bottom Layer, 13 vias

## Nets (pads, with @x,y where several pads share a name; then routed paths per layer and width w, separated by ;. In a path a pad name is that pad's centre, name@x,y a point inside that pad or via, vN(x,y) a via of type N, cw(c..) or ccw(c..) an arc to the next point about the centre after c; other vN are vias at no path point)
3V3: C16.2 C17.2 C18.2 C19.2 C20.2 C21.2 C22.2 C23.2 C24.2 C25.1 C26.1 C55.2 P2.1 P14.3 R1.2 R2.2 R4.2 R6.2 R26.1 R40.1 R41.1 U1.6 U1.11 U1.19 U1.21 U1.22 U1.28 U1.50 U1.75 U1.100 U8.2 | length 63.1
  Top Layer w0.254: R6.2 v3(53,58.4)
  Top Layer w0.3: R40.1 v3(25.144,35.812) ; R41.1 v3(26.926,35.812) ; P14.3 31.41,71.55 31.41,60.045 31.4,60.035 31.4,57.307 32.1,56.607 U1.50 ; U1.75 v2(32.2,44.6) ; v2(43.1,56.5) U1.28 ; v2(44,49.6) U1.11 ; v2(44,53.6) U1.19 ; U1.100 v2(44.1,44.7) ; U1.6 v2(47.3,47.1) ; U1.21 v2(47.64,54.6) ; U1.22 46.807,55.1 47.307,55.6 v2(47.64,55.6) ; U8.2 59.177,52.666 R26.1
  Top Layer w0.5: v1(56,52.723) C55.2 ; C55.2@56.978,52.722 U8.2@59.121,52.722
  Bottom Layer w0.254: v3(36.5,33.8) 36.5,30.58 37.6,29.48 38.14,28.94 R2.2 40.42,28.94 R1.2@40.46,28.9
  Bottom Layer w0.3: C20.2 v2(32.1,56.5) ; v2(32.2,44.6) C21.2 ; v2(43.1,56.5) C19.2 C19.2@43.271,55.629 ; C17.2 v2(44,49.6) ; C18.2 v2(44,53.6) ; v2(44.1,44.7) C22.2 C16.2 v2(45.7,43.9) ; v2(47.64,52.6) C24.2 ; v2(47.64,54.6) 47.86,54.6 48.34,54.12 C23.2 C24.2 ; v2(47.64,55.6) C26.1 C25.1 ; R4.2 C24.2
5V_MCU: C2.1 C4.1 C54.2 C60.2 C62.1 C63.1 L3.2 P1.1 P3.4 P7.10 R20.2 R27.1 U2.16 U3.16 U8.3 | length 36.4
  Top Layer w0.3: v2(11,1.2) 11.01,1.19 11.69,1.19 C2.1 11.893,1.373 13.898,1.373 U2.16 ; v2(11.7,11.8) C4.1 11.923,12.803 13.943,12.803 U3.16 ; R27.1 64.3,66.7 L3.2 ; v2(76.5,56.6) 76.51,56.61 77.19,56.61 R20.2
  Top Layer w0.5: v3(37.74,31.64) P3.4 ; P7.10 48.2,69.92 v3(48.2,67.7) ; C54.2 61.299,56.501 61.299,53.694 U8.3 ; v2(63.6,56.5) 64.28,56.5 C63.1 C63.1@64.299,56.522
  Bottom Layer w0.3: v2(63.6,56.5) 76.359,56.5 76.459,56.6 v2(76.5,56.6)
  other v1: 62.6,56.1 62.6,57.1
5V_RASB: C31.2 C38.2 C41.1 C42.1 L1.2 P8.1 P8.3 R10.2 R15.1 | length 19.4
  Top Layer w0.3: R15.1 64.2,90.7 L1.2 ; v2(76.5,80.4) 76.51,80.41 77.19,80.41 R10.2
  Bottom Layer w0.3: v1(62.7,80.8) 76.059,80.8 76.459,80.4 v2(76.5,80.4)
  other v1: 61.8,80.8 61.8,81.7 62.7,81.7
9V_STA: C72.1 Q1.2 R29.1 R30.1 R32.1 R34.2 R36.2 U9.2 | length 45.8
  Top Layer w0.3: R30.1 25.98,94.8 35.1,94.8 35.25,94.65 35.25,92.75 34.4,91.9 Q1.2
  Top Layer w0.4: R32.1 R36.2 C72.1 ; R29.1 R30.1@24.86,93.7 ; R30.1@24.88,93.68 R30.1@24.86,93.7 ; R30.1 R30.1@24.86,93.7 ; R34.2 28,83.075 U9.2 C72.1 ; C72.1 22.6,93.7 R30.1@24.86,93.7
10V_WC: C66.2 C68.1 C69.1 L4.2 pad.2@60.7,33.1 R21.2 R28.1 | length 19.9
  Top Layer w0.3: pad.2@60.7,33.1 v2(60.8,33) ; R28.1 64.28,42.72 L4.2 ; v2(74.7,32.7) R21.2
  Bottom Layer w0.3: v2(60.8,33) 74.4,33 v2(74.7,32.7)
12V_CAM: C44.2 C46.1 C47.1 L2.2 pad.2@60.5,9 R12.2 R16.1 | length 21.8
  Top Layer w0.3: R16.1 64.24,18.66 L2.2 ; v2(76.4,8.6) 76.41,8.61 77.19,8.61 R12.2
  Bottom Layer w0.3: v2(60.5,9) 75.959,9 76.359,8.6 v2(76.4,8.6)
24V: C36.1 C37.2 C39.1 C40.1 C43.2 C45.1 C58.1 C59.2 C61.1 C64.1 C65.2 C67.1 C70.2 C71.1 P9.1 R9.2 R11.2 R19.2 R22.2 U4.2 U5.2 U6.2 U7.2 U9.3 | length 57.1
  Top Layer w0.3: R19.2 v2(89.4,53) ; R11.2 v2(89.3,4.8) ; R22.2 v2(89.4,29) ; R9.2 v2(89.4,76.7)
  Top Layer w0.4: U9.3 34.24,85.4 C70.2 C71.1 ; C71.1@39.5,85.5 C71.1 ; P9.1 57.1,88.6 53.9,85.4 C71.1
  PWR w0.3: v2(89.3,4.8) 89.3,18.7
  other v1: 92.008,18.47 94.408,18.47 92.008,19.67 94.408,19.67 92.008,20.87 94.408,20.87 92.008,22.07 94.408,22.07 97.3,30 97.3,31.2 97.3,32.4 97.3,33.6 92.008,42.67 94.408,42.67 92.008,43.87 94.408,43.87 92.008,45.07 94.408,45.07 92.008,46.27 94.408,46.27 97.3,54.2 97.3,55.4 97.3,56.6 97.3,57.8 92.008,66.57 94.408,66.57 92.008,67.77 94.408,67.77 92.008,68.97 94.408,68.97 92.008,70.17 94.408,70.17 97.3,76.9 97.3,78.1 97.3,79.3 97.3,80.5 92,91.3 94.4,91.3 92,92.5 94.4,92.5 92,93.7 94.4,93.7 72.2,93.9 73.4,93.9 74.6,93.9 75.8,93.9 92,94.9 94.4,94.9
232_IN1: P4.2 U2.13 | length 8.8
  Top Layer w0.6: P4.2 8.66,5.24 U2.13
232_IN2: P6.2 U3.13 | length 10.4
  Top Layer w0.6: P6.2 12.51,16.67 U3.13
232_OUT1: P4.1 U2.14 | length 8.3
  Top Layer w0.6: P4.1 7.55,3.97 U2.14
232_OUT2: P6.1 U3.14 | length 8.8
  Top Layer w0.6: P6.1 8.7,15.4 U3.14
AGND: C23.1 C24.1 C25.2 C26.2 P5.2 U1.20 | length 6.4
  Top Layer w0.3: U1.20 46.959,54.1 47.259,53.8 v2(47.5,53.8)
  Bottom Layer w0.3: C24.1 C25.2
  other v2: 49.86,53.4 49.86,54.8 49.86,56.4
BGND: C70.1 C71.2 C72.2 D6.2 P10.2 P11.2 pad.4 Q2.2 Q4.3 R36.1 R38.2 R39.1 | length 12.8
  Top Layer w0.3: D6.2 v1(16.7,84.2) ; v2(32.95,87.75) Q2.2
  Top Layer w0.4: R38.2 11.71,83.79 12.39,83.79 v2(12.4,83.8)
  Top Layer w0.5: v1(20.3,80.2) R36.1 ; v1(22.6,79.2) C72.2 ; R39.1 v1(34.9,78.4) ; v2(37.4,83.18) C70.1 37.42,83.88 38.55,82.75 39.05,82.75 C71.2 41.44,82.4 42.44,81.4 pad.4
GND: C2.2 C4.2 C5.1 C6.1 C9.1 C10.1 C11.2 C12.2 C13.1 C14.1 C15.1 C16.1 C17.1 C18.1 C19.1 C20.1 C21.1 C22.1 C27.1 C28.1 C31.1 C32.2 C33.2 C36.2 C37.1 C38.1 C39.2 C40.2 C41.2 C42.2 C43.1 C44.1 C45.2 C46.2 C47.2 C48.1 C49.1 C52.2 C53.2 C54.1 C55.1 C58.2 C59.1 C60.1 C61.2 C62.2 C63.2 C64.2 C65.1 C66.1 C67.2 C68.2 C69.2 D1.2 D2.2 D3.2 D4.2 D5.2 D7.2 P1.2 P2.4 P3.1 P4.3 P7.8 P8.5 P8.10 P9.2 P13.2 P13.4 P14.4 pad.3 R3.1 R5.2 R7.2 R8.2 R13.1 R14.1 R17.2 R18.2 R23.1 R25.1 S1.2 U1.10 U1.27 U1.74 U1.99 U2.15 U3.15 U4.4 U4.9 U5.4 U5.9 U6.4 U6.9 U7.4 U7.9 U8.1 | length 138.8
  Top Layer w0.3: v2(10.8,2.8) 10.829,2.771 11.629,2.771 C2.2 U2.15 ; v2(10.8,14.1) C4.2 11.715,14.115 13.985,14.115 U3.15 ; D7.2 D7.2@20.117,35.052 ; v2(22.9,9.2) 22.91,9.19 22.91,8.51 C9.1 ; C10.1 v2(23.6,20) ; C5.1 v2(23,4.9) ; C6.1 v2(23.1,16.4) ; C14.1 28.12,43.68 28.35,43.91 28.35,44.057 29.393,45.1 U1.74 31.8,45.1 32.4,45.7 32.4,46 ; C15.1 30.69,60.61 30.69,61.29 v2(30.7,61.3) ; R3.1 37.09,60.61 37.09,61.39 v2(37.1,61.4) ; v3(41.52,31.62) P3.1@41.52,32.7 ; v2(41.6,38.24) R5.2@41.6,38.94 ; 41.8,48 43.493,48 44.593,49.1 U1.10 v2(47.2,49.1) ; v2(43.3,59.7) 43.3,59.659 43.6,59.359 U1.27 43.6,56.948 43.8,56.748 43.8,55.8 ; 43.525,46.025 43.525,44.462 43.6,44.387 U1.99 ; v2@49.1,51.6 v2(49.1,51.621) ; C13.1 52.36,60.26 S1.2 ; 56.4,42.38 56.42,42.4 ; v2(57,55.6) 57,54.746 C55.1 57.079,54.621 U8.1 59.121,56.367 C54.1@59.254,56.5 ; v2(58.5,56.5) C54.1@59.254,56.5 ; C54.1 C54.1@59.254,56.5 ; D3.2 61.1,47.627 v2(61.1,46.8) ; v2(61.3,36.7) D5.2 ; v2(61.5,12.7) D2.2 ; v2(61.8,60.6) D4.2 ; v2(61.9,84.7) D1.2 ; 47.972,42.392 47.98,42.4 47.972,42.392
  Top Layer w0.5: v2(47.2,49.1) v2(48.9,49.1) v2(51,47) v2(51,45.42) 51,44.1 v2(50.7,43.8) 50,43.1 v2(49.7,43.1) 49.7,42.46 49.64,42.4 v2(48.81,42.4) 47.98,42.4 ; 47.972,42.392 46.88,41.3 v2(46.515,41.3) v2(45.3,41.3) 44.6,40.6 v2(44.6,40) v2(44.6,38.4) v2(44.6,37) 45.3,36.3 v2(46.5,36.3) v2(48.5,36.3) v2(50.7,36.3) v2(52.7,36.3) v2(54.7,36.3) v2(56.8,36.3) v2(58.9,36.3) v2(59.8,37.2) v2(59.8,39.7) v2(58.4,41.1) 58.2,41.3 57.48,41.3 v2(56.94,41.84) 56.4,42.38 56.38,42.4 v2(55.55,42.4) 54.72,42.4 v2(54.72,43.24) 53.96,43.24 v2(53.1,44.1) v2(53.1,45.74) v2(53.1,47.6) v2(51.112,49.588) v2@49.1,51.6
  Top Layer w0.6: U7.4 80.695,35.105 80.7,35.1 ; U5.4 80.795,10.905 80.9,10.8 ; 80.8,58.9 80.895,58.995 U6.4 ; U4.4 80.895,83.255 82.35,81.8 U4.9
  Bottom Layer w0.3: 50.8,65.7 50.9,65.8
  Bottom Layer w0.5: 3.6,12.8 3.62,12.78 P4.3 ; 3.7,71.1 3.797,71.197 P8.10 ; 6.2,10.5 P4.3 ; 6.2,15 P4.3 ; 8.6,12.8 8.58,12.78 P4.3 ; P8.5 9.027,76.09 9.027,79.85 C31.1 ; P2.4 34,38.5 34.1,38.6 ; 49.3,91.7 P9.2 ; 52,89.4 52.02,89.42 P9.2 ; 52,94.2 52.02,94.18 P9.2 ; 54.2,91.8 54.1,91.7 P9.2
  other v1: 63.7,4.68 64.9,4.68 66.1,4.68 67.3,4.68 68.5,6.38 92,8.3 81.5,9.4 82.7,9.4 83.9,9.4 92,9.5 81.5,10.6 82.7,10.6 83.9,10.6 92,10.7 92,11.9 85.52,14.9 87.6,16.1 87.6,17.3 63.7,28.68 64.9,28.68 66.1,28.68 67.3,28.68 68.5,30.38 92.2,32.7 81.4,33.5 82.6,33.5 83.8,33.5 92.2,33.9 81.4,34.7 82.6,34.7 83.8,34.7 92.2,35.1 92.2,36.3 85.42,39.2 87.6,40.3 87.6,41.5 63.7,52.2 64.9,52.2 66.1,52.2 67.3,52.2 68.5,53.9 92.2,56.5 81.6,57.4 82.8,57.4 84,57.4 92.2,57.7 81.6,58.6 82.8,58.6 84,58.6 92.2,58.9 92.2,60.1 85.8,63.1 87.9,64.3 87.9,65.5 64.1,76.58 65.3,76.58 66.5,76.58 67.7,76.58 68.9,78.28 81.6,81.2 82.8,81.2 84,81.2 92.2,81.2 81.6,82.4 82.8,82.4 84,82.4 92.2,82.4 92.2,83.6 92.2,84.8 86.2,86.6 88.3,88.1 88.3,89.3
  other v2: 80.49,2.39 8.9,17.8 80.39,26.59 38.8,40.6 47.6,42 28.1,42.98 34.4,45.3 39.6,45.7 43.4,46.9 49.95,48.05 52.1,48.7 41.08,49.6 32.9,49.7 80.49,50.49 38.2,51.1 41.08,53.6 32.8,54.3 36.8,55.8 40.88,55.8 80.5,74.3
  other v3: 35.19,29.8 44.07,29.8 20.422,34.747
LED: D8.2 U1.81 | length 9.5
  Top Layer w0.3: D8.2 33.02,35.052 34.6,36.632 U1.81
MPU_INT: P1.8 U1.65 | length 55.4
  Top Layer w0.3: 19.8,43.2 19.8,44.199 25.201,49.6 U1.65
  Bottom Layer w0.3: v3(19.8,42.9) 19.8,27.9 36.18,11.52 P1.8
NetC1_1: C1.1 U2.3 | length 2.7
  Top Layer w0.3: U2.3 20.87,3.97 21.38,3.46 C1.1
NetC1_2: C1.2 U2.1 | length 2.7
  Top Layer w0.4: U2.1 20.87,1.43 21.38,1.94 C1.2
NetC3_1: C3.1 U3.3 | length 2.6
  Top Layer w0.3: U3.3 20.88,15.4 21.38,14.9 C3.1
NetC3_2: C3.2 U3.1 | length 2.6
  Top Layer w0.3: U3.1 20.86,12.86 21.38,13.38 C3.2
NetC5_2: C5.2 U2.2 | length 4
  Top Layer w0.3: U2.2 C5.2
NetC6_2: C6.2 U3.2 | length 4.1
  Top Layer w0.3: U3.2 19.005,14.135 23.095,14.135 C6.2
NetC7_1: C7.1 U2.5 | length 2.5
  Top Layer w0.3: U2.5 19.013,6.567 21.247,6.567 C7.1
NetC7_2: C7.2 U2.4 | length 2.5
  Top Layer w0.3: U2.4 18.976,5.22 21.38,5.22 C7.2
NetC8_1: C8.1 U3.5 | length 2.5
  Top Layer w0.3: U3.5 19.057,17.997 21.177,17.997 C8.1
NetC8_2: C8.2 U3.4 | length 2.4
  Top Layer w0.3: U3.4 19.015,16.685 21.385,16.685 C8.2
NetC9_2: C9.2 U2.6 | length 2.8
  Top Layer w0.3: U2.6 20.7,7.78 21.4,8.48 C9.2
NetC10_2: C10.2 U3.6 | length 2.7
  Top Layer w0.3: U3.6 20.63,19.21 21.4,19.98 C10.2
NetC11_1: C11.1 U1.13 Y1.2 | length 20.3
  Top Layer w0.3: U1.13 49.007,50.6 52.4,47.207 52.4,43.04 C11.1 52.8,42.16 52.8,40.1 54.2,38.7 Y1.2
NetC12_1: C12.1 U1.12 Y1.1 | length 19.5
  Top Layer w0.3: U1.12 48.8,50.1 51.9,47 51.9,42.94 C12.1 51.6,42.16 51.6,40 50.3,38.7 Y1.1
NetC14_2: C14.2 U1.73 | length 2.6
  Top Layer w0.3: C14.2 28.5,45.6 U1.73
NetC15_2: C15.2 U1.49 | length 2.6
  Top Layer w0.3: C15.2 32.6,60.2 U1.49
NetC27_2: C27.2 C29.2 U4.6 | length 3.8
  Top Layer w0.3: C27.2 C29.2 82.133,76.733 82.133,78.859 U4.6
NetC28_2: C28.2 C30.2 U5.6 | length 3.9
  Top Layer w0.3: C28.2 C30.2 82.082,4.818 82.082,7.075 U5.6
NetC29_1: C29.1 R7.1 | length 1.7
  Top Layer w0.3: R7.1 C29.1
NetC30_1: C30.1 R8.1 | length 1.8
  Top Layer w0.3: R8.1 C30.1
NetC32_1: C32.1 U4.8 | length 1.8
  Top Layer w0.3: U4.8 84.713,78.9 C32.1
NetC33_1: C33.1 U5.8 | length 1.9
  Top Layer w0.3: U5.8 84.613,7.1 C33.1
NetC34_1: C34.1 L1.1 U4.3 | length 2.4
  Top Layer w0.3: U4.3 v2(82.165,85.7)
  Bottom Layer w0.3: v2(82.165,85.7) 82.165,86.385 C34.1
NetC34_2: C34.2 U4.1 | length 2.4
  Top Layer w0.3: U4.1 v2(84.705,85.7)
  Bottom Layer w0.3: C34.2 84.705,86.395 v2(84.705,85.7)
NetC35_1: C35.1 L2.1 U5.3 | length 2.4
  Top Layer w0.3: U5.3@82.065,12.808 v2(82.065,13.8)
  Bottom Layer w0.3: v2(82.065,13.8) 82.065,14.485 C35.1
NetC35_2: C35.2 U5.1 | length 2.4
  Top Layer w0.3: U5.1@84.605,12.808 v2(84.605,13.8)
  Bottom Layer w0.3: C35.2 84.605,14.495 v2(84.605,13.8)
NetC48_2: C48.2 C50.2 U6.6 | length 3.8
  Top Layer w0.3: C48.2 C50.2 82.133,52.953 82.133,55.06 U6.6
NetC49_2: C49.2 C51.2 U7.6 | length 3.8
  Top Layer w0.3: C49.2 C51.2 81.983,29.017 81.983,31.174 U7.6
NetC50_1: C50.1 R17.1 | length 1.9
  Top Layer w0.3: R17.1 C50.1
NetC51_1: C51.1 R18.1 | length 1.8
  Top Layer w0.3: R18.1 C51.1
NetC52_1: C52.1 U6.8 | length 1.9
  Top Layer w0.3: U6.8 84.713,55.1 C52.1
NetC53_1: C53.1 U7.8 | length 1.9
  Top Layer w0.3: U7.8 84.513,31.2 C53.1
NetC56_1: C56.1 L3.1 U6.3 | length 2.4
  Top Layer w0.3: U6.3 v2(82.165,61.9)
  Bottom Layer w0.3: v2(82.165,61.9) 82.165,62.585 C56.1
NetC56_2: C56.2 U6.1 | length 2.4
  Top Layer w0.3: U6.1 v2(84.705,61.9)
  Bottom Layer w0.3: C56.2 84.705,62.595 v2(84.705,61.9)
NetC57_1: C57.1 L4.1 U7.3 | length 2.4
  Top Layer w0.3: U7.3 v2(81.965,38)
  Bottom Layer w0.3: v2(81.965,38) 81.965,38.685 C57.1
NetC57_2: C57.2 U7.1 | length 2.4
  Top Layer w0.3: U7.1 v2(84.505,38)
  Bottom Layer w0.3: C57.2 84.505,38.695 v2(84.505,38)
NetC73_2: C73.2 Q3.1 R33.1 R35.1 | length 6.8
  Top Layer w0.4: Q3.1 R33.1 14.4,89.22 13.9,89.72 R35.1 13.96,91.04 14.9,91.04 16.38,92.52 C73.2
NetD1_1: D1.1 R15.2 | length 2
  Top Layer w0.3: D1.1 R15.2
NetD2_1: D2.1 R16.2 | length 1.9
  Top Layer w0.3: D2.1 R16.2
NetD3_1: D3.1 R26.2 | length 1.9
  Top Layer w0.3: R26.2 61.047,49.38 D3.1
NetD4_1: D4.1 R27.2 | length 2.1
  Top Layer w0.3: D4.1 R27.2
NetD5_1: D5.1 R28.2 | length 2
  Top Layer w0.3: D5.1 R28.2
NetD6_1: D6.1 R32.2 | length 1.8
  Top Layer w0.4: D6.1 16.71,81.59 18.49,81.59 R32.2
NetD7_1: D7.1 R40.2 | length 1.9
  Top Layer w0.3: D7.1 R40.2
NetD8_1: D8.1 R41.2 | length 1.9
  Top Layer w0.3: R41.2 D8.1
NetL5_2: L5.2 R35.2 | length 1.8
  Top Layer w0.4: L5.2 R35.2
NetP10_1: P10.1 P11.1 Q1.3 Q2.3 | length 11.1
  Top Layer w0.3: Q2.3 Q1.3 39.79,92.85 P10.1 P11.1
NetQ1_1: Q1.1 R31.2 | length 2.3
  Top Layer w0.3: R31.2 Q1.1
NetQ2_1: Q2.1 Q4.4 R30.2 R31.1 | length 13.9
  Top Layer w0.3: R30.2 26.41,93.69 26.41,91.01 Q4.4 30.4,91 ; R31.1 30.38,91.02 30.4,91 ; Q2.1 31.75,89.65 30.4,91
NetQ3_3: Q3.3 Q4.2 R37.2 | length 4
  Top Layer w0.4: Q3.3 16.63,86.63 18.77,86.63 R37.2 Q4.2
NetQ4_1: Q4.1 R29.2 R33.2 | length 6.3
  Top Layer w0.4: R33.2 17,89.2 Q4.1 R29.2
NetR3_2: R3.2 U1.37 | length 2.4
  Top Layer w0.3: U1.37 R3.2
NetR5_1: R5.1 U1.94 | length 2.6
  Top Layer w0.3: U1.94 41.1,41.06 41.54,40.62 R5.1@41.54,40.6
NetR9_1: R9.1 U4.7 | length 2.4
  Top Layer w0.3: U4.7 83.435,77.285 84,76.72 R9.1
NetR10_1: R10.1 R13.2 U4.5 | length 3.7
  Top Layer w0.3: R10.1 R13.2 80.887,78.9 U4.5
NetR11_1: R11.1 U5.7 | length 2.5
  Top Layer w0.3: U5.7 83.335,5.385 83.9,4.82 R11.1
NetR12_1: R12.1 R14.2 U5.5 | length 3.6
  Top Layer w0.3: R12.1 R14.2 80.787,7.1 U5.5
NetR19_1: R19.1 U6.7 | length 2.2
  Top Layer w0.3: U6.7 83.435,53.385 83.8,53.02 R19.1
NetR20_1: R20.1 R23.2 U6.5 | length 3.7
  Top Layer w0.3: R20.1 R23.2 80.887,55.1 U6.5
NetR21_1: R21.1 R24.2 U7.5 | length 6
  Top Layer w0.3: R21.1 75.42,31.18 76.3,30.3 77.7,30.3 78.58,31.18 R24.2 80.683,31.18 U7.5
NetR22_1: R22.1 U7.7 | length 2.5
  Top Layer w0.3: U7.7 83.235,29.785 84,29.02 R22.1
NetR24_1: R24.1 R25.2 | length 2.2
  Top Layer w0.3: R25.2 77.23,31.41 77.29,31.41 78.58,32.7 R24.1
NetR34_1: R34.1 R39.2 U9.1 | length 5.8
  Top Layer w0.4: R34.1 R39.2 32.3,78.7 32.3,78.89 32.925,79.515 32.925,80.315 33.425,80.815 U9.1
NRST: C13.2 R6.1 S1.1 U1.14 | length 18.7
  Top Layer w0.3: U1.14 47.1,51.1 48.4,52.4 S1.1@48.4,62.44 ; S1.1 S1.1@48.4,62.44 ; R6.1 C13.2 S1.1@48.4,62.44
NTC_IN: P5.1 R4.1 U1.18 | length 13.6
  Top Layer w0.3: U1.18 v2(47.1,53.1)
  Bottom Layer w0.3: v2(47.1,53.1) 47.071,53.071 47.071,52.844 47.065,52.838 47.065,50.785 47.65,50.2 51.6,50.2 52.4,51 P5.1 51.4,51 R4.1 R4.1@49.86,50.98
PWM1: P13.1 U1.95 | length 15.8
  Top Layer w0.3: U1.95 41.6,41.6 42.9,40.3 42.9,34.82 P13.1
PWM2: P13.3 U1.96 | length 20.2
  Top Layer w0.3: U1.96 42.1,41.807 43.7,40.207 43.7,34.9 46.9,31.7 51.1,31.7 P13.3
RX1: U1.69 U3.12 | length 42.3
  Top Layer w0.3: U3.12 15.317,17.94 16.077,18.7 16.077,37.093 19.484,40.5 25.677,40.5 26.637,41.46 26.637,46.053 28.184,47.6 U1.69
RX2: U1.87 U2.12 | length 51.8
  Top Layer w0.3: U2.12 15.61,6.51 16.5,7.4 16.5,10.093 17.507,11.099 24.751,11.099 25.249,11.099 33.266,19.117 33.266,32.504 37.6,36.838 37.6,40.3 U1.87
RX3: P14.2 U1.48 | length 15.6
  Top Layer w0.3: P14.2 33.1,72.4 U1.48
RX6_RASB: P8.7 U1.64 | length 37.8
  Top Layer w0.3: P8.7 7.577,74.7 7.577,69.693 27.17,50.1 U1.64
SCL1: P3.3 R2.1 U1.92 | length 13.1
  Top Layer w0.3: v2(39,31.5) P3.3 39,39.699 40.1,40.799 U1.92
  Bottom Layer w0.3: R2.1 38.8,31.3 v2(39,31.5) v2@39.005,31.495
SCL3: P1.3 U1.67 | length 60.3
  Top Layer w0.3: v3@22.3,43.1 22.3,43.593 27.307,48.6 U1.67
  Bottom Layer w0.3: v3(22.3,42.9) 22.3,28.7 38.1,12.9 44.7,12.9 48.88,8.72 P1.3
SDA1: P3.2 R1.1 U1.93 | length 12.8
  Top Layer w0.3: v2(40.27,31.5) 40.265,31.505 40.265,33.865 40.6,34.2 U1.93
  Bottom Layer w0.3: v2(40.27,31.5) 40.5,31.27 R1.1
SDA3: P1.4 U1.66 | length 61.4
  Top Layer w0.3: 21.1,43.2 21.1,43.8 26.4,49.1 U1.66
  Bottom Layer w0.3: v3(21.05,42.9) 21.05,28.182 37.466,11.766 44.316,11.766 46.34,9.742 P1.4
SWCLK: P2.3 U1.76 | length 6.5
  Top Layer w0.3: P2.3 29.677,42.3 30.377,43 U1.76
SWDIO: P2.2 U1.72 | length 10.7
  Top Layer w0.3: P2.2 27.137,45.66 27.577,46.1 U1.72
TETHER_A: L5.1 P12.1 | length 7.7
  Top Layer w0.5: P12.1 4.45,90.45 L5.1@12.1,90.45
TETHER_B: C73.1 P12.2 Q3.2 R37.1 R38.1 | length 22.6
  Top Layer w0.4: P12.2 4.41,85.31 11.69,85.31 R38.1 ; v2(11.7,86) R38.1 ; v2(16.4,90.3) C73.1 ; R37.1 15.11,85.14 14.6,85.65 Q3.2 14.225,85.475 11.875,85.475 R38.1
  Bottom Layer w0.4: v2(11.7,86) 16,90.3 v2(16.4,90.3)
TX1: U1.68 U3.11 | length 41.6
  Top Layer w0.3: U3.11 15.287,19.21 15.577,19.5 15.577,37.3 19.277,41 25.47,41 26.077,41.607 26.077,46.2 27.977,48.1 U1.68
TX2: U1.86 U2.11 | length 50.2
  Top Layer w0.3: U2.11 15.48,7.78 16,8.3 16,10.442 17.258,11.7 17.4,11.7 25,11.7 32.596,19.296 32.596,32.766 37.1,37.27 37.1,40.507 U1.86
TX3: P14.1 U1.47 | length 16.2
  Top Layer w0.3: U1.47 33.6,72.36 P14.1 P14.1@35.2,73.4
TX6_RASB: P8.9 U1.63 | length 39.2
  Top Layer w0.3: v2(8.277,71.3) 8.277,69.7 27.377,50.6 U1.63
  Bottom Layer w0.3: P8.9 5.037,74.7 6.777,74.7 7.581,73.896 7.581,72.596 8.277,71.9 v2(8.277,71.3)
W5500_CS: P7.3 U1.29 | length 8.5
  Top Layer w0.3: P7.3 43.5,64.46 43.5,61.4 42.6,60.5 U1.29
W5500_INT: P7.4 U1.26 | length 9.1
  Top Layer w0.3: U1.26 44.1,59.9 46,61.8 46,64.9 45.14,65.76 P7.4
W5500_MISO: P7.7 U1.31 | length 15.7
  Top Layer w0.3: U1.31 41.6,60.1 40.7,61 40.7,66.6 41.2,67.1 42.9,67.1 43.5,67.7 43.5,69.54 P7.7
W5500_MOSI: P7.5 U1.32 | length 12
  Top Layer w0.3: U1.32 41.1,59.6 40.1,60.6 40.1,67.2 41.2,68.3 P7.5
W5500_NST: P7.6 U1.25 | length 12.5
  Top Layer w0.3: 45.54,68.3 46.6,67.24 46.6,58.5 45.7,57.6 U1.25
W5500_SCLK: P7.1 U1.30 | length 5.1
  Top Layer w0.3: U1.30 42.1,63.12 P7.1
pads on no net: P1.5 P1.6 P1.7 P1.9 P1.10 P7.2 P7.9 P8.2 P8.4 P8.6 P8.8 P8.11 P8.12 U1.1 U1.2 U1.3 U1.4 U1.5 U1.7 U1.8 U1.9 U1.15 U1.16 U1.17 U1.23 U1.24 U1.33 U1.34 U1.35 U1.36 U1.38 U1.39 U1.40 U1.41 U1.42 U1.43 U1.44 U1.45 U1.46 U1.51 U1.52 U1.53 U1.54 U1.55 U1.56 U1.57 U1.58 U1.59 U1.60 U1.61 U1.62 U1.70 U1.71 U1.77 U1.78 U1.79 U1.80 U1.82 U1.83 U1.84 U1.85 U1.88 U1.89 U1.90 U1.91 U1.97 U1.98 U2.7 U2.8 U2.9 U2.10 U3.7 U3.8 U3.9 U3.10

## Polygon pours and split planes (outlines as drawn)
BGND on AGND "GND" (solid, remove dead copper, pour order 4): 0,96 0,83 14.2,83 19.5,77.7 45.5,77.7 45.5,96
GND on AGND "GND" (solid, remove dead copper, pour order 8): 0,0 100,0 100,96 0,96
AGND on AGND "GND" (solid, remove dead copper, pour order 6): 47,57.6 53.7,57.6 53.7,51.9 47,51.9
24V on PWR "GND" (solid, remove dead copper, pour order 28): 54.5,84.2 89.1,84.2 89.1,17.4 100,17.4 100,96 54.5,96
5V_RASB on PWR "GND" (solid, remove dead copper, pour order 20): -0.013,69 -0.013,83.6 88.5,83.6 88.5,69
5V_MCU on PWR "GND" (solid, remove dead copper, pour order 16): 0,0 88.5,0 88.5,68.4 0,68.4
3V3 on PWR "GND" (solid, remove dead copper, pour order 14): 56.4,38.8 50.8,33.2 25.8,33.2 23.3,35.7 23.3,40 30.6,47.3 30.6,56.7 38.2,56.7 45.3,63.8 56.4,63.8
GND on Top Layer "GND" (solid, remove dead copper, pour order 78): 31.467,57.3 44.7,57.3 44.7,44 31.563,44
GND on Top Layer "GND" (solid, remove dead copper, pour order 76): 84.36,14.5 85.36,14.5 85.36,11.3 94.1,11.3 94.1,17.6 85.66,17.6 85.56,17.5 85.56,16.5 84.36,15.3
GND on Top Layer "GND" (solid, remove dead copper, pour order 74): 84.26,38.8 85.26,38.8 85.26,35.6 94.1,35.6 94.1,41.9 85.46,41.9 85.46,40.56 84.26,39.36
GND on Top Layer "GND" (solid, remove dead copper, pour order 72): 84.46,62.7 85.46,62.7 85.46,59.5 94.108,59.5 94.108,65.9 85.9,65.9 85.66,65.66 85.66,64.46 84.46,63.26
GND on Top Layer "GND" (solid, remove dead copper, pour order 70): 84.5,86.3 85.5,86.3 85.5,83.1 94.1,83.1 94.1,90.4 86.8,90.4 85.7,89.3 85.7,88.3 84.5,87.1
GND on Top Layer "GND" (solid, remove dead copper, pour order 68): 58.3,6.7 66.938,6.7 68.038,7.8 69.6,7.8 69.6,11.5 87.338,11.5 88.508,12.67 94.108,12.67 94.108,-0.03 58.3,-0.03
GND on Top Layer "GND" (solid, remove dead copper, pour order 66): 58.2,30.7 66.8,30.7 68,31.9 70.608,31.9 70.608,35.8 87.438,35.8 88.508,36.87 94.108,36.87 94.108,23.9 58.2,23.9
GND on Top Layer "GND" (solid, remove dead copper, pour order 64): 62.4,54.7 67.3,54.7 68,55.4 69.9,55.4 69.9,59.7 87.438,59.7 88.508,60.77 94.108,60.77 94.108,48.07 62.4,48.07
GND on Top Layer "GND" (solid, remove dead copper, pour order 62): 61.4,79.1 67.7,79.1 68.5,79.9 70.6,79.9 70.6,83.5 86.5,83.5 88.5,85.5 94.1,85.5 94.1,71.7 61.4,71.7
5V_MCU on Top Layer "GND" (solid, remove dead copper, pour order 2): 63.858,57.7 60.8,57.7 60.8,55.4 63.858,55.4
5V_MCU on Top Layer "GND" (solid, remove dead copper, pour order 54): 63.4,67.4 63.4,58.7 63.4,55.4 67.2,55.4 67.8,56 69.1,56 69.1,67.4
10V_WC on Top Layer "GND" (solid, remove dead copper, pour order 52): 63.2,43.6 63.2,34.9 58.2,34.9 58.2,31.7 67,31.7 67.7,32.4 68.9,32.4 68.9,43.6
12V_CAM on Top Layer "GND" (solid, remove dead copper, pour order 50): 63.3,19.4 63.3,10.7 58.3,10.7 58.3,7.5 67,7.5 67.7,8.2 69,8.2 69,19.4
NetC35_1 on Top Layer "GND" (solid, remove dead copper, pour order 48): 82.4,12.1 82.4,14.2 82.1,14.5 82.1,19.4 77.1,19.4 77.1,14.9 80.3,14.9 81.4,13.8 81.4,12.1
NetC57_1 on Top Layer "GND" (solid, remove dead copper, pour order 46): 82.3,36.2 82.3,38.3 82,38.6 82,43.5 77,43.5 77,39 80.2,39 81.3,37.9 81.3,36.2
NetC56_1 on Top Layer "GND" (solid, remove dead copper, pour order 44): 82.5,60.1 82.5,62.2 82.2,62.5 82.2,67.4 77.2,67.4 77.2,62.9 80.4,62.9 81.5,61.8 81.5,60.1
NetC34_1 on Top Layer "GND" (solid, remove dead copper, pour order 42): 82.5,83.9 82.5,86 82.2,86.3 82.2,91.2 77.2,91.2 77.2,86.7 80.4,86.7 81.5,85.6 81.5,83.9
24V on Top Layer "GND" (solid, remove dead copper, pour order 40): 54.5,90.1 60.9,90.1 60.9,91.8 94.6,91.8 94.6,18 100,18 100,96 54.5,96
24V on Top Layer "GND" (solid, remove dead copper, pour order 36): 94.8,18 85.5,18 85.1,17.6 85.1,16.5 83.9,15.3 83.9,12.1 82.8,12.1 82.8,14.2 82.5,14.5 82.5,22.6 94.8,22.6
24V on Top Layer "GND" (solid, remove dead copper, pour order 34): 94.9,42.2 85.4,42.2 85,41.8 85,40.6 83.8,39.4 83.8,36.2 82.7,36.2 82.7,38.4 82.4,38.7 82.4,46.8 94.9,46.8
24V on Top Layer "GND" (solid, remove dead copper, pour order 32): 94.8,66.2 85.6,66.2 85.2,65.8 85.2,64.5 84,63.3 84,60.1 82.9,60.1 82.9,62.3 82.6,62.6 82.6,70.8 94.8,70.8
24V on Top Layer "GND" (solid, remove dead copper, pour order 30): 94.8,90.9 86.7,90.9 85.2,89.4 85.2,88.3 84,87.1 84,83.9 82.9,83.9 82.9,86.1 82.6,86.4 82.6,96 94.8,96
5V_RASB on Top Layer "GND" (solid, remove dead copper, pour order 18): 68.4,80.5 69.7,80.5 69.7,84.7 68.4,86 68.4,91.3 63.4,91.3 63.4,82.9 62.9,82.4 61.3,82.4 61.3,80.2 68.1,80.2
GND on Bottom Layer "GND" (solid, remove dead copper, pour order 58): 0,0 100,0 100,96 0,96

## Other copper
Top Layer:
  pour cut-out: 49.7,37.6 54.9,37.6 54.9,41.2 54.8,41.1 49.7,41.1
  pour cut-out: 44.8,96 44.8,77.5 17.2,77.5 12.8,81.9 0,81.9 0,96
  pour cut-out: 29.4,44.2 29.4,42.7 31.6,42.7 31.6,44.2
PWR:
  pour cut-out: 76.1,57 76.9,57 76.9,56.2 76.1,56.2
  pour cut-out: 63.2,56.9 64,56.9 64,56.1 63.2,56.1
Bottom Layer:
  pour cut-out: 4.7,11.2 7.7,11.2 7.7,14.3 4.7,14.3
  pour cut-out: 2.497,71.683 5.097,71.683 5.097,74.683 2.497,74.683
  pour cut-out: 50.4,89.983 53.6,89.983 53.6,93.3 50.4,93.3
  pour cut-out: 30.5,39.8 30.5,37.2 33.5,37.2 33.5,39.8
  pour cut-out: 7.1,80.9 7.1,74.2 11.1,74.2 11.1,80.9

## Silkscreen, mask and mechanical layers (free items; w line width, h text height)
Top Overlay:
  text "G   3.3   R   T" at 26.695,70.79 h1.52
  text "水下机器人控制板Tv1.0" at 5.4,63.8 h3.5 r270
  text "V1.1" at 2.2,53.9 h2.5 r270
  text "P1   G   P2   G" at 47.295,27.28 h1.52
  text "UART1" at 26.8,20.9 h2.5 r270
  text "UART2" at 26.8,9.6 h2.5 r270
Bottom Solder:
  rectangle: 86.7,6 98,17
  rectangle: 58.5,16.3 76,31.6
  rectangle: 63.7,40.5 77.8,55.3
  rectangle: 61.9,64.4 77.7,79.1
  rectangle: 63.7,1 80.6,7.6
  rectangle: 77.3,1 88.2,12.9
  rectangle: 75.7,16.3 88.4,37.2
  rectangle: 77.5,40.5 88.4,61.1
  rectangle: 77.3,64.4 88.4,84.8
Mechanical 1:
  circle w0.15: c18.827,74.67 r1.75
  circle w0.15: c18.827,25.67 r1.75
  lines w0.15: 0,95.977 0,0 100,0 100,96 0.023,96

## Text inside footprints (layer, text, board x,y; h text height)
P8: Top Overlay "1" at 16.497,76.448 h1.27 r180; Top Overlay "2" at 16.497,73.908 h1.27 r180